# Altium PCB GRIPPER2009.PcbDoc (part 1 of 4)
Units mm, origin at the board's own origin, x right, y up, seen from the top; angles counter-clockwise.
Board outline 100.25 x 80.25 mm, 4 copper layers (Top Layer, Mid-Layer 1, Mid-Layer 2, Bottom Layer); 370 components, 241 nets, 1110 pads, 418 vias.
Unrouted connection lines stored in the file: 10.
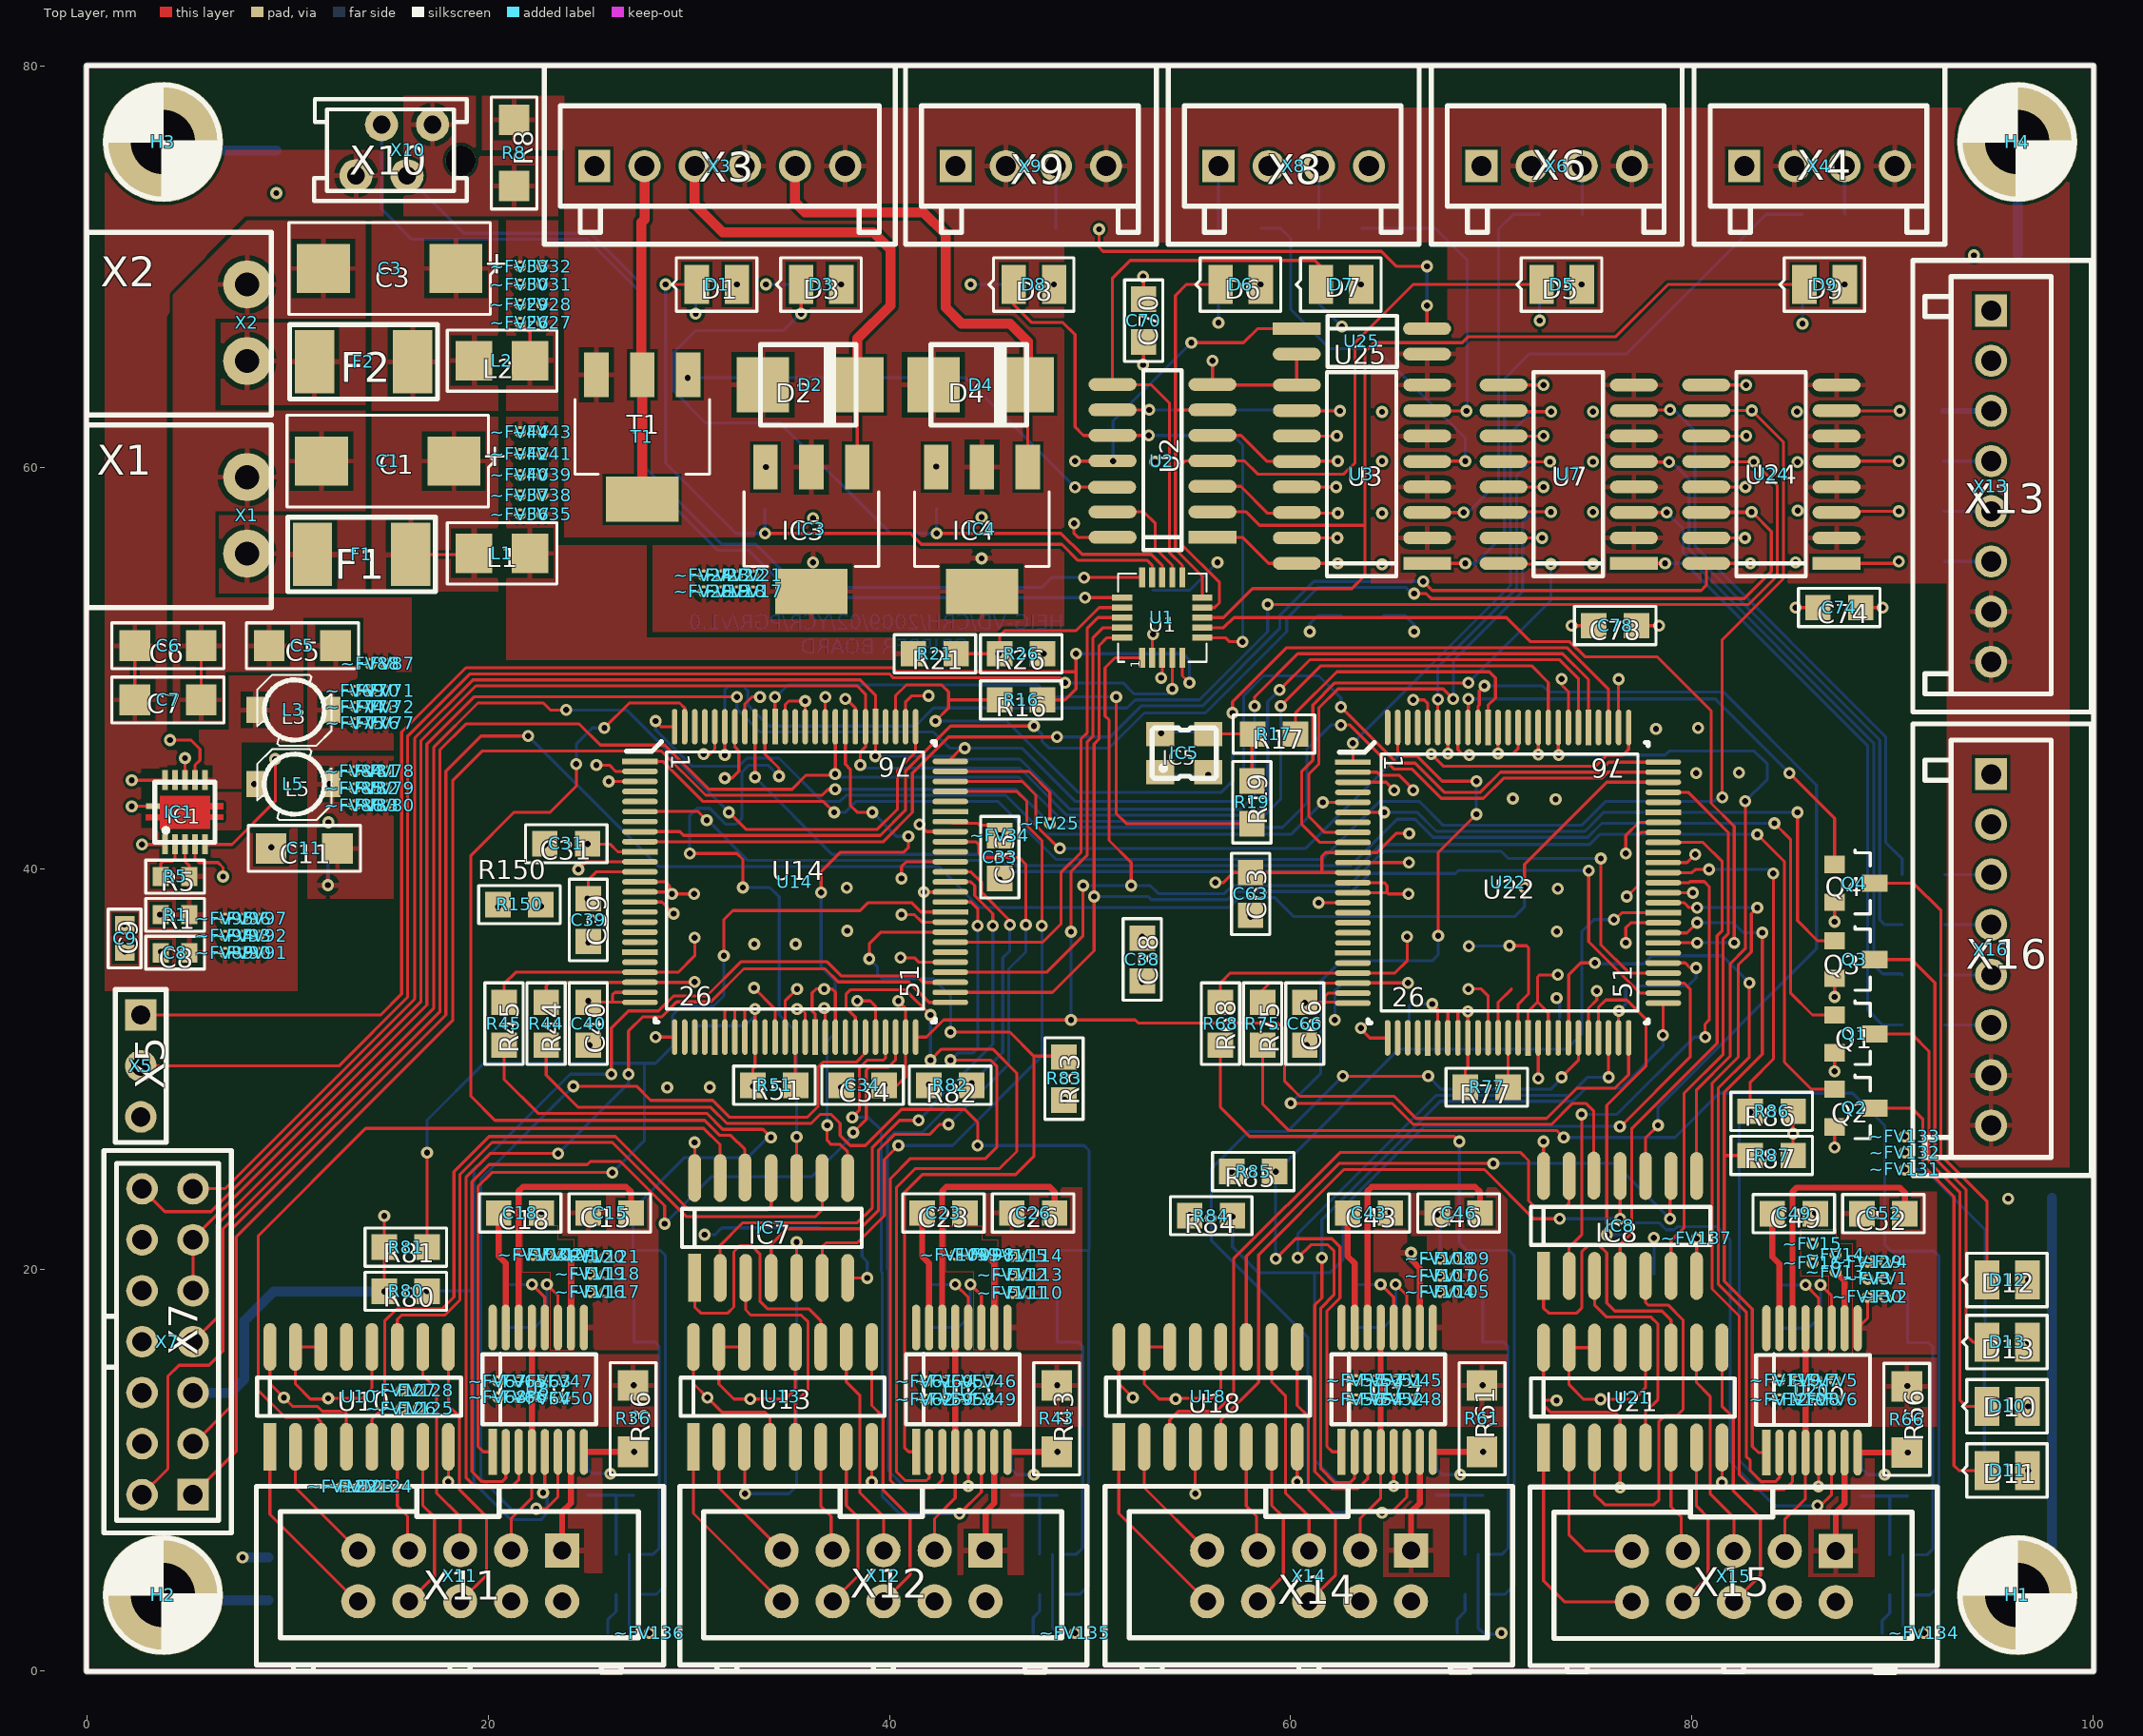
[diagram p0: Top Layer view]
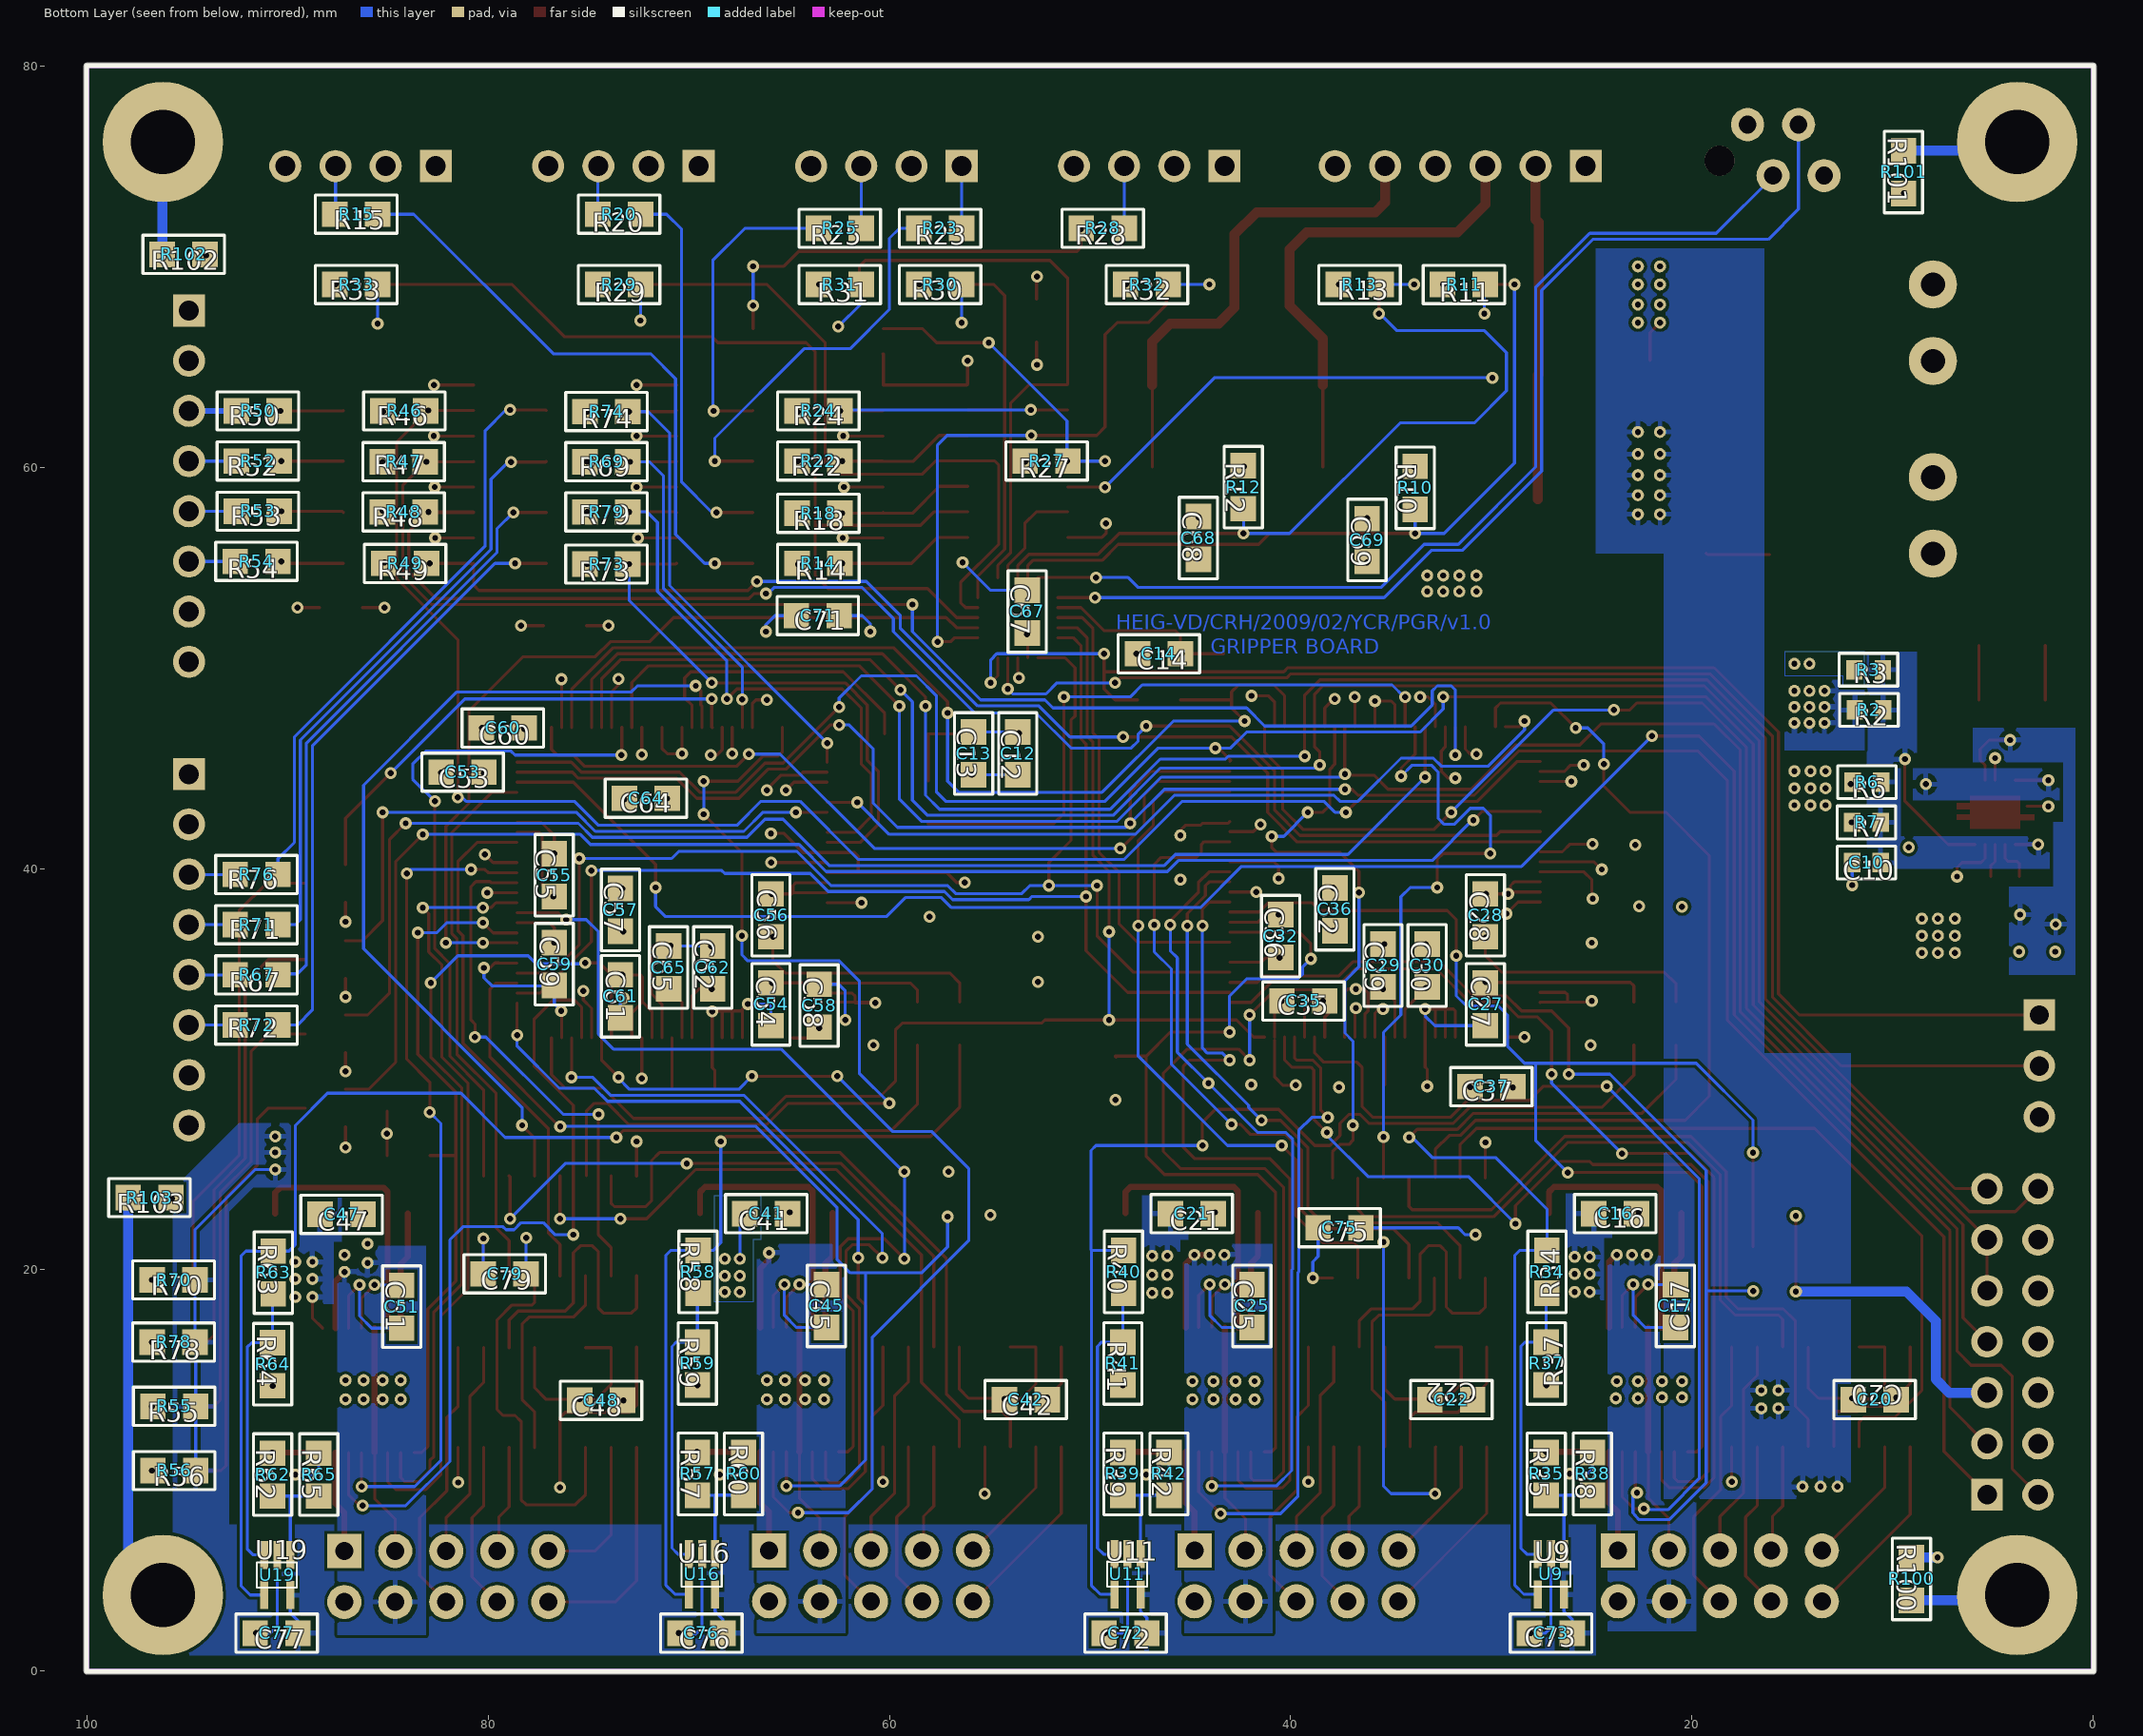
[diagram p1: Bottom Layer view, seen from below]
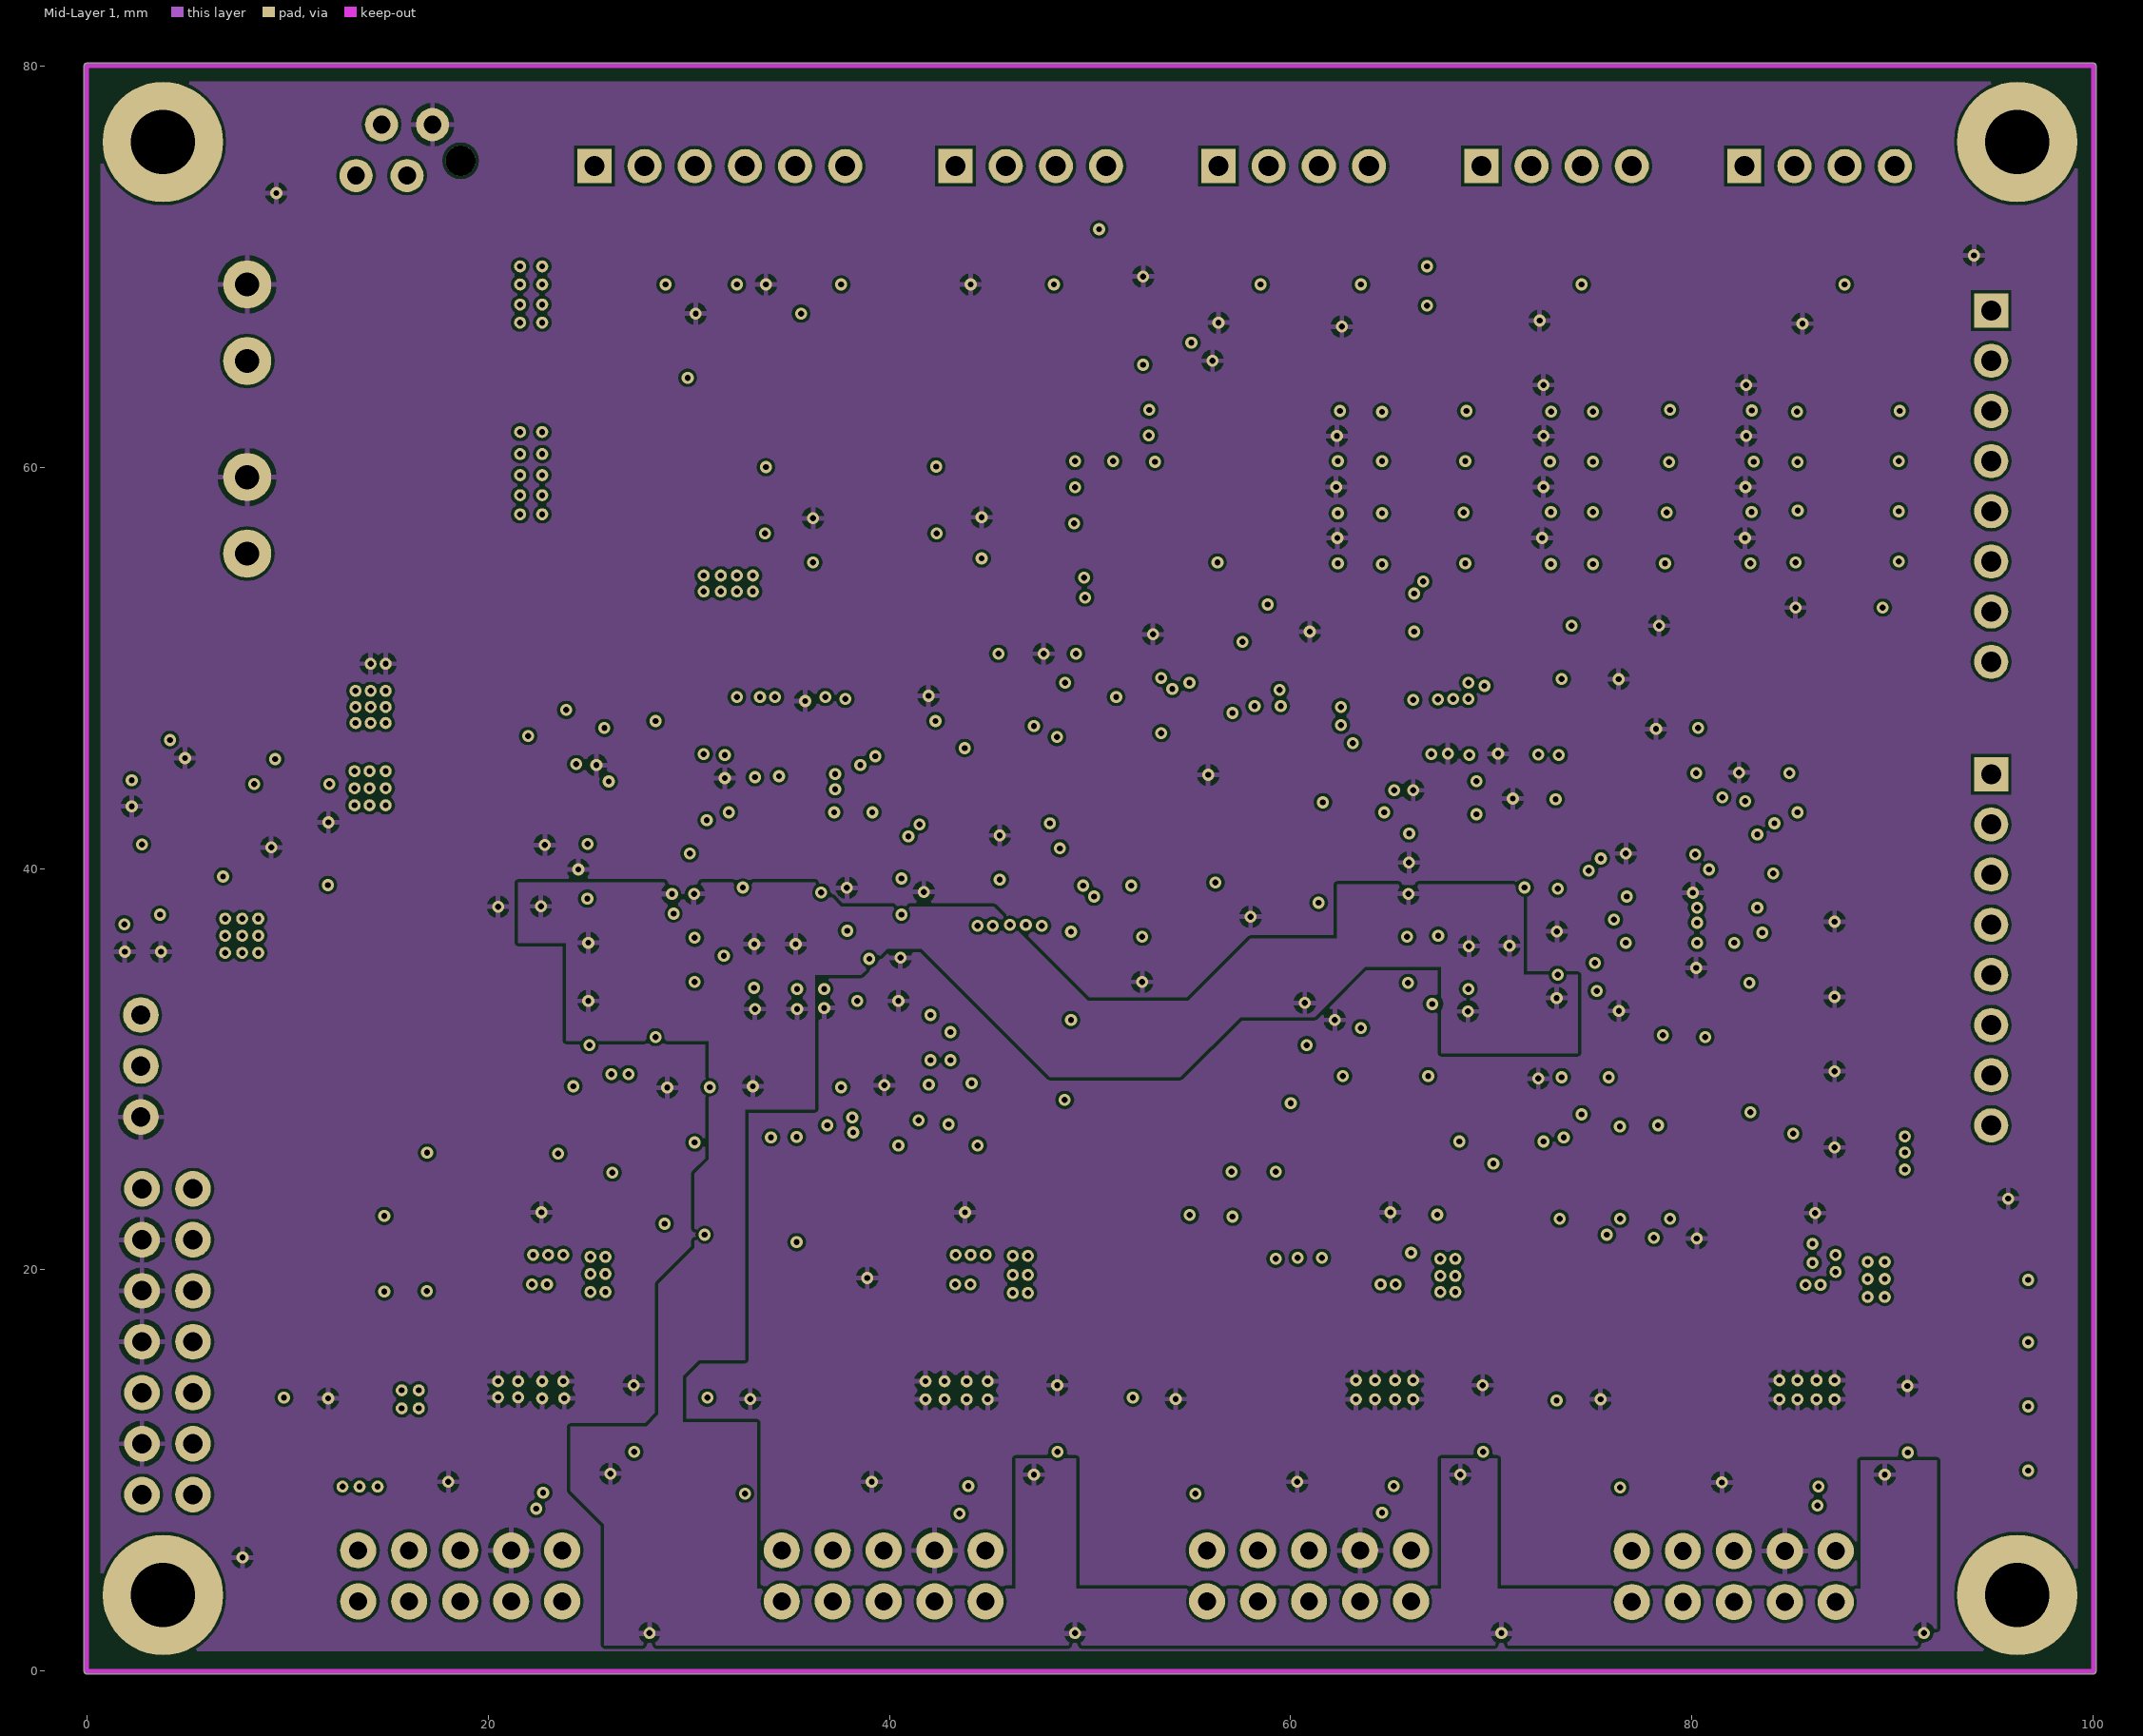
[diagram p2: Mid-Layer 1]
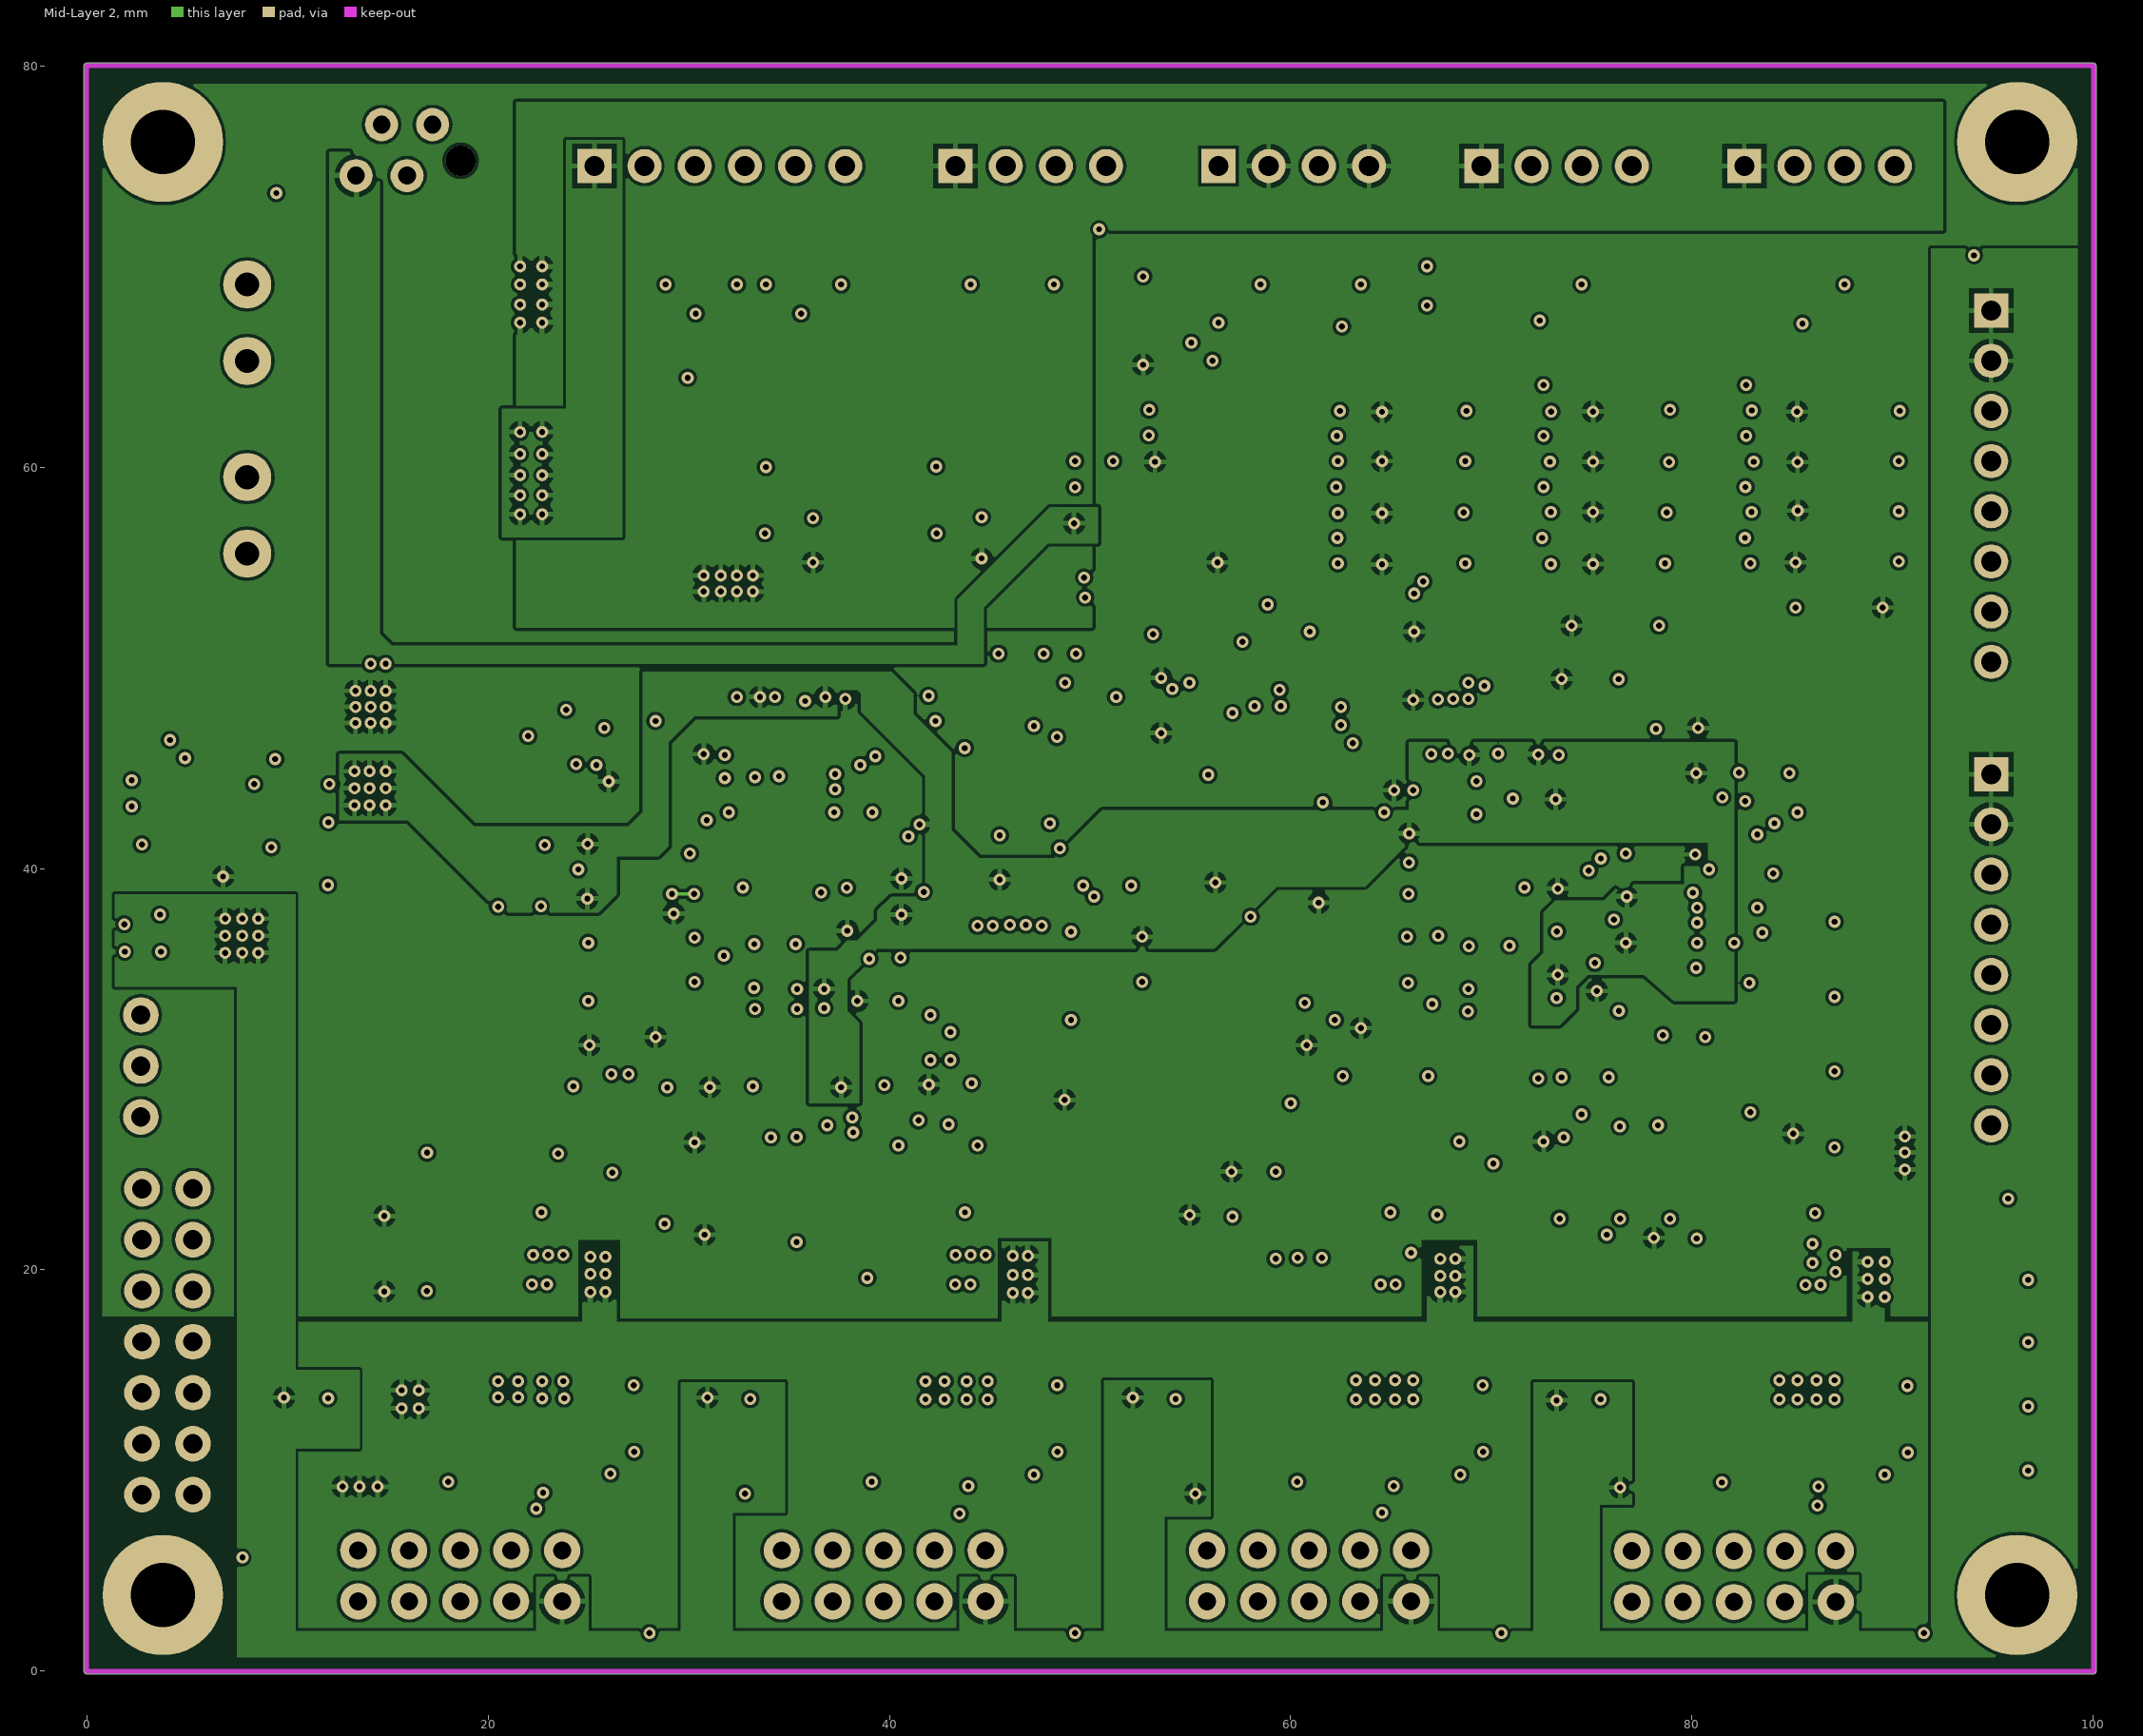
[diagram p3: Mid-Layer 2]

## Layer stack, top to bottom
Top Solder: solder mask 0.0102, Solder Resist, Dk 3.5
Top Layer: signal copper 0.0356
Dielectric 1: dielectric 0.32, FR-4, Dk 4.8
Mid-Layer 1: signal copper 0.0356
Dielectric2: dielectric 0.32, FR-4, Dk 4.8
Mid-Layer 2: signal copper 0.0356
Dielectric3: dielectric 0.32, FR-4, Dk 4.8
Bottom Layer: signal copper 0.0356
Bottom Solder: solder mask 0.0102, Solder Resist, Dk 3.5

## Board outline
-0.125,0 -0.125,80 cw(c0,80) 0,80.125 100,80.125 cw(c100,80) 100.125,80 100.125,0 cw(c100,0) 100,-0.125 0,-0.125 cw(c0,0)

## Design rules (kind name [scope] priority, off if disabled: settings)
Clearance Clearance_4 [OnLayer('Mid-Layer 2') And (IsThruPin Or IsSMTPin Or IsWire) vs OnLayer('Mid-Layer 2') And (IsThruPin Or IsSMTPin Or IsWire Or IsVia)] p1: gap=0.15 ignorepadtopadclearanceinfootprint=FALSE
Clearance Clearance_3 [OnLayer('Mid-Layer 1') And (IsThruPin Or IsSMTPin Or IsWire) vs OnLayer('Mid-Layer 1') And (IsThruPin Or IsSMTPin Or IsWire Or IsVia)] p2: gap=0.15 ignorepadtopadclearanceinfootprint=FALSE
Clearance Clearance_2 [OnLayer('Bottom Layer') And (IsThruPin Or IsSMTPin Or IsWire) vs OnLayer('Bottom Layer') And (IsThruPin Or IsSMTPin Or IsWire Or IsVia)] p3: gap=0.15 ignorepadtopadclearanceinfootprint=FALSE
Clearance Clearance_1 [OnLayer('Top Layer') And (IsThruPin Or IsSMTPin Or IsWire Or IsVia) vs OnLayer('Top Layer') And (IsThruPin Or IsSMTPin Or IsWire Or IsVia)] p4: gap=0.15 ignorepadtopadclearanceinfootprint=FALSE
Clearance [All] p5: gap=0.152 ignorepadtopadclearanceinfootprint=FALSE
PlaneConnect [All] p1: planeconnectstyle=Relief reliefexpansion=0.15 reliefentries=4 reliefconductorwidth=0.15 reliefairgap=0.3
PolygonConnect [All] p1: connectstyle=Relief reliefconductorwidth=0.254 reliefentries=4 polygonreliefangle="90 Angle" airgapwidth=0.254
RoutingLayers RoutingLayers_1 [All] p1: top layer_v5=TRUE mid layer 1_v5=TRUE mid layer 2_v5=TRUE bottom layer_v5=TRUE
RoutingLayers [All] p2: top layer_v5=TRUE mid layer 1_v5=TRUE mid layer 2_v5=TRUE bottom layer_v5=TRUE
RoutingVias [All] p1: holewidth=0.711 width=1.27 viastyle="Through Hole" minholewidth=0.711 minwidth=1.27 maxholewidth=0.711 maxwidth=1.27
SolderMaskExpansion [All] p1: expansion=0 istentingtop=FALSE
ViasUnderSMD VIA_UnderSMD_973 [(Name = 'X16-8')] p1: allowed=TRUE
ViasUnderSMD VIA_UnderSMD_972 [(Name = 'X16-7')] p2: allowed=FALSE
ViasUnderSMD VIA_UnderSMD_971 [(Name = 'X16-6')] p3: allowed=FALSE
ViasUnderSMD VIA_UnderSMD_970 [(Name = 'X16-5')] p4: allowed=FALSE
ViasUnderSMD VIA_UnderSMD_969 [(Name = 'X16-4')] p5: allowed=FALSE
ViasUnderSMD VIA_UnderSMD_968 [(Name = 'X16-3')] p6: allowed=FALSE
ViasUnderSMD VIA_UnderSMD_967 [(Name = 'X16-2')] p7: allowed=FALSE
ViasUnderSMD VIA_UnderSMD_966 [(Name = 'X16-1')] p8: allowed=FALSE
ViasUnderSMD VIA_UnderSMD_965 [(Name = 'X15-10')] p9: allowed=FALSE
ViasUnderSMD VIA_UnderSMD_964 [(Name = 'X15-9')] p10: allowed=FALSE
ViasUnderSMD VIA_UnderSMD_963 [(Name = 'X15-8')] p11: allowed=FALSE
ViasUnderSMD VIA_UnderSMD_962 [(Name = 'X15-7')] p12: allowed=FALSE
ViasUnderSMD VIA_UnderSMD_961 [(Name = 'X15-6')] p13: allowed=FALSE
ViasUnderSMD VIA_UnderSMD_960 [(Name = 'X15-5')] p14: allowed=FALSE
ViasUnderSMD VIA_UnderSMD_959 [(Name = 'X15-4')] p15: allowed=FALSE
ViasUnderSMD VIA_UnderSMD_958 [(Name = 'X15-3')] p16: allowed=FALSE
ViasUnderSMD VIA_UnderSMD_957 [(Name = 'X15-2')] p17: allowed=FALSE
ViasUnderSMD VIA_UnderSMD_956 [(Name = 'X15-1')] p18: allowed=FALSE
ViasUnderSMD VIA_UnderSMD_955 [(Name = 'X14-10')] p19: allowed=FALSE
ViasUnderSMD VIA_UnderSMD_954 [(Name = 'X14-9')] p20: allowed=FALSE
ViasUnderSMD VIA_UnderSMD_953 [(Name = 'X14-8')] p21: allowed=FALSE
ViasUnderSMD VIA_UnderSMD_952 [(Name = 'X14-7')] p22: allowed=FALSE
ViasUnderSMD VIA_UnderSMD_951 [(Name = 'X14-6')] p23: allowed=FALSE
ViasUnderSMD VIA_UnderSMD_950 [(Name = 'X14-5')] p24: allowed=FALSE
ViasUnderSMD VIA_UnderSMD_949 [(Name = 'X14-4')] p25: allowed=FALSE
ViasUnderSMD VIA_UnderSMD_948 [(Name = 'X14-3')] p26: allowed=FALSE
ViasUnderSMD VIA_UnderSMD_947 [(Name = 'X14-2')] p27: allowed=FALSE
ViasUnderSMD VIA_UnderSMD_946 [(Name = 'X14-1')] p28: allowed=FALSE
ViasUnderSMD VIA_UnderSMD_945 [(Name = 'X13-8')] p29: allowed=FALSE
ViasUnderSMD VIA_UnderSMD_944 [(Name = 'X13-7')] p30: allowed=FALSE
ViasUnderSMD VIA_UnderSMD_943 [(Name = 'X13-6')] p31: allowed=FALSE
ViasUnderSMD VIA_UnderSMD_942 [(Name = 'X13-5')] p32: allowed=FALSE
ViasUnderSMD VIA_UnderSMD_941 [(Name = 'X13-4')] p33: allowed=FALSE
ViasUnderSMD VIA_UnderSMD_940 [(Name = 'X13-3')] p34: allowed=FALSE
ViasUnderSMD VIA_UnderSMD_939 [(Name = 'X13-2')] p35: allowed=FALSE
ViasUnderSMD VIA_UnderSMD_938 [(Name = 'X13-1')] p36: allowed=FALSE
ViasUnderSMD VIA_UnderSMD_937 [(Name = 'X12-10')] p37: allowed=FALSE
ViasUnderSMD VIA_UnderSMD_936 [(Name = 'X12-9')] p38: allowed=FALSE
ViasUnderSMD VIA_UnderSMD_935 [(Name = 'X12-8')] p39: allowed=FALSE
ViasUnderSMD VIA_UnderSMD_934 [(Name = 'X12-7')] p40: allowed=FALSE
ViasUnderSMD VIA_UnderSMD_933 [(Name = 'X12-6')] p41: allowed=FALSE
ViasUnderSMD VIA_UnderSMD_932 [(Name = 'X12-5')] p42: allowed=FALSE
ViasUnderSMD VIA_UnderSMD_931 [(Name = 'X12-4')] p43: allowed=FALSE
ViasUnderSMD VIA_UnderSMD_930 [(Name = 'X12-3')] p44: allowed=FALSE
ViasUnderSMD VIA_UnderSMD_929 [(Name = 'X12-2')] p45: allowed=FALSE
ViasUnderSMD VIA_UnderSMD_928 [(Name = 'X12-1')] p46: allowed=FALSE
ViasUnderSMD VIA_UnderSMD_927 [(Name = 'X11-10')] p47: allowed=FALSE
ViasUnderSMD VIA_UnderSMD_926 [(Name = 'X11-9')] p48: allowed=FALSE
ViasUnderSMD VIA_UnderSMD_925 [(Name = 'X11-8')] p49: allowed=FALSE
ViasUnderSMD VIA_UnderSMD_924 [(Name = 'X11-7')] p50: allowed=FALSE
ViasUnderSMD VIA_UnderSMD_923 [(Name = 'X11-6')] p51: allowed=FALSE
ViasUnderSMD VIA_UnderSMD_922 [(Name = 'X11-5')] p52: allowed=FALSE
ViasUnderSMD VIA_UnderSMD_921 [(Name = 'X11-4')] p53: allowed=FALSE
ViasUnderSMD VIA_UnderSMD_920 [(Name = 'X11-3')] p54: allowed=FALSE
ViasUnderSMD VIA_UnderSMD_919 [(Name = 'X11-2')] p55: allowed=FALSE
ViasUnderSMD VIA_UnderSMD_918 [(Name = 'X11-1')] p56: allowed=FALSE
ViasUnderSMD VIA_UnderSMD_917 [(Name = 'X10-HOLE')] p57: allowed=FALSE
ViasUnderSMD VIA_UnderSMD_916 [(Name = 'X10-4')] p58: allowed=FALSE
ViasUnderSMD VIA_UnderSMD_915 [(Name = 'X10-3')] p59: allowed=FALSE
ViasUnderSMD VIA_UnderSMD_914 [(Name = 'X10-2')] p60: allowed=FALSE
ViasUnderSMD VIA_UnderSMD_913 [(Name = 'X10-1')] p61: allowed=FALSE
ViasUnderSMD VIA_UnderSMD_912 [(Name = 'X9-4')] p62: allowed=FALSE
ViasUnderSMD VIA_UnderSMD_911 [(Name = 'X9-3')] p63: allowed=FALSE
ViasUnderSMD VIA_UnderSMD_910 [(Name = 'X9-2')] p64: allowed=FALSE
ViasUnderSMD VIA_UnderSMD_909 [(Name = 'X9-1')] p65: allowed=FALSE
ViasUnderSMD VIA_UnderSMD_908 [(Name = 'X8-4')] p66: allowed=FALSE
ViasUnderSMD VIA_UnderSMD_907 [(Name = 'X8-3')] p67: allowed=FALSE
ViasUnderSMD VIA_UnderSMD_906 [(Name = 'X8-2')] p68: allowed=FALSE
ViasUnderSMD VIA_UnderSMD_905 [(Name = 'X8-1')] p69: allowed=FALSE
ViasUnderSMD VIA_UnderSMD_904 [(Name = 'X7-14')] p70: allowed=FALSE
ViasUnderSMD VIA_UnderSMD_903 [(Name = 'X7-13')] p71: allowed=FALSE
ViasUnderSMD VIA_UnderSMD_902 [(Name = 'X7-12')] p72: allowed=FALSE
ViasUnderSMD VIA_UnderSMD_901 [(Name = 'X7-11')] p73: allowed=FALSE
ViasUnderSMD VIA_UnderSMD_900 [(Name = 'X7-10')] p74: allowed=FALSE
ViasUnderSMD VIA_UnderSMD_899 [(Name = 'X7-9')] p75: allowed=FALSE
ViasUnderSMD VIA_UnderSMD_898 [(Name = 'X7-8')] p76: allowed=FALSE
ViasUnderSMD VIA_UnderSMD_897 [(Name = 'X7-7')] p77: allowed=FALSE
ViasUnderSMD VIA_UnderSMD_896 [(Name = 'X7-6')] p78: allowed=FALSE
ViasUnderSMD VIA_UnderSMD_895 [(Name = 'X7-5')] p79: allowed=FALSE
ViasUnderSMD VIA_UnderSMD_894 [(Name = 'X7-4')] p80: allowed=FALSE
ViasUnderSMD VIA_UnderSMD_893 [(Name = 'X7-3')] p81: allowed=FALSE
ViasUnderSMD VIA_UnderSMD_892 [(Name = 'X7-2')] p82: allowed=FALSE
ViasUnderSMD VIA_UnderSMD_891 [(Name = 'X7-1')] p83: allowed=FALSE
ViasUnderSMD VIA_UnderSMD_890 [(Name = 'X6-4')] p84: allowed=FALSE
ViasUnderSMD VIA_UnderSMD_889 [(Name = 'X6-3')] p85: allowed=FALSE
ViasUnderSMD VIA_UnderSMD_888 [(Name = 'X6-2')] p86: allowed=FALSE
ViasUnderSMD VIA_UnderSMD_887 [(Name = 'X6-1')] p87: allowed=FALSE
ViasUnderSMD VIA_UnderSMD_886 [(Name = 'X5-3')] p88: allowed=FALSE
ViasUnderSMD VIA_UnderSMD_885 [(Name = 'X5-2')] p89: allowed=FALSE
ViasUnderSMD VIA_UnderSMD_884 [(Name = 'X5-1')] p90: allowed=FALSE
ViasUnderSMD VIA_UnderSMD_883 [(Name = 'X4-4')] p91: allowed=FALSE
ViasUnderSMD VIA_UnderSMD_882 [(Name = 'X4-3')] p92: allowed=FALSE
ViasUnderSMD VIA_UnderSMD_881 [(Name = 'X4-2')] p93: allowed=FALSE
ViasUnderSMD VIA_UnderSMD_880 [(Name = 'X4-1')] p94: allowed=FALSE
ViasUnderSMD VIA_UnderSMD_879 [(Name = 'X3-6')] p95: allowed=FALSE
ViasUnderSMD VIA_UnderSMD_878 [(Name = 'X3-5')] p96: allowed=FALSE
ViasUnderSMD VIA_UnderSMD_877 [(Name = 'X3-4')] p97: allowed=FALSE
ViasUnderSMD VIA_UnderSMD_876 [(Name = 'X3-3')] p98: allowed=FALSE
ViasUnderSMD VIA_UnderSMD_875 [(Name = 'X3-2')] p99: allowed=FALSE
ViasUnderSMD VIA_UnderSMD_874 [(Name = 'X3-1')] p100: allowed=FALSE
ViasUnderSMD VIA_UnderSMD_873 [(Name = 'X2-2')] p101: allowed=FALSE
ViasUnderSMD VIA_UnderSMD_872 [(Name = 'X2-1')] p102: allowed=FALSE
ViasUnderSMD VIA_UnderSMD_871 [(Name = 'X1-2')] p103: allowed=FALSE
ViasUnderSMD VIA_UnderSMD_870 [(Name = 'X1-1')] p104: allowed=FALSE
ViasUnderSMD VIA_UnderSMD_869 [(Name = 'U25-4')] p105: allowed=FALSE
ViasUnderSMD VIA_UnderSMD_868 [(Name = 'U25-3')] p106: allowed=FALSE
ViasUnderSMD VIA_UnderSMD_867 [(Name = 'U25-2')] p107: allowed=FALSE
ViasUnderSMD VIA_UnderSMD_866 [(Name = 'U25-1')] p108: allowed=FALSE
ViasUnderSMD VIA_UnderSMD_865 [(Name = 'U24-16')] p109: allowed=FALSE
ViasUnderSMD VIA_UnderSMD_864 [(Name = 'U24-15')] p110: allowed=FALSE
ViasUnderSMD VIA_UnderSMD_863 [(Name = 'U24-14')] p111: allowed=FALSE
ViasUnderSMD VIA_UnderSMD_862 [(Name = 'U24-13')] p112: allowed=FALSE
ViasUnderSMD VIA_UnderSMD_861 [(Name = 'U24-12')] p113: allowed=FALSE
ViasUnderSMD VIA_UnderSMD_860 [(Name = 'U24-11')] p114: allowed=FALSE
ViasUnderSMD VIA_UnderSMD_859 [(Name = 'U24-10')] p115: allowed=FALSE
ViasUnderSMD VIA_UnderSMD_858 [(Name = 'U24-9')] p116: allowed=FALSE
ViasUnderSMD VIA_UnderSMD_857 [(Name = 'U24-8')] p117: allowed=FALSE
ViasUnderSMD VIA_UnderSMD_856 [(Name = 'U24-7')] p118: allowed=FALSE
ViasUnderSMD VIA_UnderSMD_855 [(Name = 'U24-6')] p119: allowed=FALSE
ViasUnderSMD VIA_UnderSMD_854 [(Name = 'U24-5')] p120: allowed=FALSE
ViasUnderSMD VIA_UnderSMD_853 [(Name = 'U24-4')] p121: allowed=FALSE
ViasUnderSMD VIA_UnderSMD_852 [(Name = 'U24-3')] p122: allowed=FALSE
ViasUnderSMD VIA_UnderSMD_851 [(Name = 'U24-2')] p123: allowed=FALSE
ViasUnderSMD VIA_UnderSMD_850 [(Name = 'U24-1')] p124: allowed=FALSE
ViasUnderSMD VIA_UnderSMD_849 [(Name = 'U22-100')] p125: allowed=FALSE
ViasUnderSMD VIA_UnderSMD_848 [(Name = 'U22-99')] p126: allowed=FALSE
ViasUnderSMD VIA_UnderSMD_847 [(Name = 'U22-98')] p127: allowed=FALSE
ViasUnderSMD VIA_UnderSMD_846 [(Name = 'U22-97')] p128: allowed=FALSE
ViasUnderSMD VIA_UnderSMD_845 [(Name = 'U22-96')] p129: allowed=FALSE
ViasUnderSMD VIA_UnderSMD_844 [(Name = 'U22-95')] p130: allowed=FALSE
ViasUnderSMD VIA_UnderSMD_843 [(Name = 'U22-94')] p131: allowed=FALSE
ViasUnderSMD VIA_UnderSMD_842 [(Name = 'U22-93')] p132: allowed=FALSE
ViasUnderSMD VIA_UnderSMD_841 [(Name = 'U22-92')] p133: allowed=FALSE
ViasUnderSMD VIA_UnderSMD_840 [(Name = 'U22-91')] p134: allowed=FALSE
ViasUnderSMD VIA_UnderSMD_839 [(Name = 'U22-90')] p135: allowed=FALSE
ViasUnderSMD VIA_UnderSMD_838 [(Name = 'U22-89')] p136: allowed=FALSE
ViasUnderSMD VIA_UnderSMD_837 [(Name = 'U22-88')] p137: allowed=FALSE
ViasUnderSMD VIA_UnderSMD_836 [(Name = 'U22-87')] p138: allowed=FALSE
ViasUnderSMD VIA_UnderSMD_835 [(Name = 'U22-86')] p139: allowed=FALSE
ViasUnderSMD VIA_UnderSMD_834 [(Name = 'U22-85')] p140: allowed=FALSE
ViasUnderSMD VIA_UnderSMD_833 [(Name = 'U22-84')] p141: allowed=FALSE
ViasUnderSMD VIA_UnderSMD_832 [(Name = 'U22-83')] p142: allowed=FALSE
ViasUnderSMD VIA_UnderSMD_831 [(Name = 'U22-82')] p143: allowed=FALSE
ViasUnderSMD VIA_UnderSMD_830 [(Name = 'U22-81')] p144: allowed=FALSE
ViasUnderSMD VIA_UnderSMD_829 [(Name = 'U22-80')] p145: allowed=FALSE
ViasUnderSMD VIA_UnderSMD_828 [(Name = 'U22-79')] p146: allowed=FALSE
ViasUnderSMD VIA_UnderSMD_827 [(Name = 'U22-78')] p147: allowed=FALSE
ViasUnderSMD VIA_UnderSMD_826 [(Name = 'U22-77')] p148: allowed=FALSE
ViasUnderSMD VIA_UnderSMD_825 [(Name = 'U22-76')] p149: allowed=FALSE
ViasUnderSMD VIA_UnderSMD_824 [(Name = 'U22-75')] p150: allowed=FALSE
ViasUnderSMD VIA_UnderSMD_823 [(Name = 'U22-74')] p151: allowed=FALSE
ViasUnderSMD VIA_UnderSMD_822 [(Name = 'U22-73')] p152: allowed=FALSE
ViasUnderSMD VIA_UnderSMD_821 [(Name = 'U22-72')] p153: allowed=FALSE
ViasUnderSMD VIA_UnderSMD_820 [(Name = 'U22-71')] p154: allowed=FALSE
ViasUnderSMD VIA_UnderSMD_819 [(Name = 'U22-70')] p155: allowed=FALSE
ViasUnderSMD VIA_UnderSMD_818 [(Name = 'U22-69')] p156: allowed=FALSE
ViasUnderSMD VIA_UnderSMD_817 [(Name = 'U22-68')] p157: allowed=FALSE
ViasUnderSMD VIA_UnderSMD_816 [(Name = 'U22-67')] p158: allowed=FALSE
ViasUnderSMD VIA_UnderSMD_815 [(Name = 'U22-66')] p159: allowed=FALSE
ViasUnderSMD VIA_UnderSMD_814 [(Name = 'U22-65')] p160: allowed=FALSE
ViasUnderSMD VIA_UnderSMD_813 [(Name = 'U22-64')] p161: allowed=FALSE
ViasUnderSMD VIA_UnderSMD_812 [(Name = 'U22-63')] p162: allowed=FALSE
ViasUnderSMD VIA_UnderSMD_811 [(Name = 'U22-62')] p163: allowed=FALSE
ViasUnderSMD VIA_UnderSMD_810 [(Name = 'U22-61')] p164: allowed=FALSE
ViasUnderSMD VIA_UnderSMD_809 [(Name = 'U22-60')] p165: allowed=FALSE
ViasUnderSMD VIA_UnderSMD_808 [(Name = 'U22-59')] p166: allowed=FALSE
ViasUnderSMD VIA_UnderSMD_807 [(Name = 'U22-58')] p167: allowed=FALSE
ViasUnderSMD VIA_UnderSMD_806 [(Name = 'U22-57')] p168: allowed=FALSE
ViasUnderSMD VIA_UnderSMD_805 [(Name = 'U22-56')] p169: allowed=FALSE
ViasUnderSMD VIA_UnderSMD_804 [(Name = 'U22-55')] p170: allowed=FALSE
ViasUnderSMD VIA_UnderSMD_803 [(Name = 'U22-54')] p171: allowed=FALSE
ViasUnderSMD VIA_UnderSMD_802 [(Name = 'U22-53')] p172: allowed=FALSE
ViasUnderSMD VIA_UnderSMD_801 [(Name = 'U22-52')] p173: allowed=FALSE
ViasUnderSMD VIA_UnderSMD_800 [(Name = 'U22-51')] p174: allowed=FALSE
ViasUnderSMD VIA_UnderSMD_799 [(Name = 'U22-50')] p175: allowed=FALSE
ViasUnderSMD VIA_UnderSMD_798 [(Name = 'U22-49')] p176: allowed=FALSE
ViasUnderSMD VIA_UnderSMD_797 [(Name = 'U22-48')] p177: allowed=FALSE
ViasUnderSMD VIA_UnderSMD_796 [(Name = 'U22-47')] p178: allowed=FALSE
ViasUnderSMD VIA_UnderSMD_795 [(Name = 'U22-46')] p179: allowed=FALSE
ViasUnderSMD VIA_UnderSMD_794 [(Name = 'U22-45')] p180: allowed=FALSE
ViasUnderSMD VIA_UnderSMD_793 [(Name = 'U22-44')] p181: allowed=FALSE
ViasUnderSMD VIA_UnderSMD_792 [(Name = 'U22-43')] p182: allowed=FALSE
ViasUnderSMD VIA_UnderSMD_791 [(Name = 'U22-42')] p183: allowed=FALSE
ViasUnderSMD VIA_UnderSMD_790 [(Name = 'U22-41')] p184: allowed=FALSE
ViasUnderSMD VIA_UnderSMD_789 [(Name = 'U22-40')] p185: allowed=FALSE
ViasUnderSMD VIA_UnderSMD_788 [(Name = 'U22-39')] p186: allowed=FALSE
ViasUnderSMD VIA_UnderSMD_787 [(Name = 'U22-38')] p187: allowed=FALSE
ViasUnderSMD VIA_UnderSMD_786 [(Name = 'U22-37')] p188: allowed=FALSE
ViasUnderSMD VIA_UnderSMD_785 [(Name = 'U22-36')] p189: allowed=FALSE
ViasUnderSMD VIA_UnderSMD_784 [(Name = 'U22-35')] p190: allowed=FALSE
ViasUnderSMD VIA_UnderSMD_783 [(Name = 'U22-34')] p191: allowed=FALSE
ViasUnderSMD VIA_UnderSMD_782 [(Name = 'U22-33')] p192: allowed=FALSE
ViasUnderSMD VIA_UnderSMD_781 [(Name = 'U22-32')] p193: allowed=FALSE
ViasUnderSMD VIA_UnderSMD_780 [(Name = 'U22-31')] p194: allowed=FALSE
ViasUnderSMD VIA_UnderSMD_779 [(Name = 'U22-30')] p195: allowed=FALSE
ViasUnderSMD VIA_UnderSMD_778 [(Name = 'U22-29')] p196: allowed=FALSE
ViasUnderSMD VIA_UnderSMD_777 [(Name = 'U22-28')] p197: allowed=FALSE
ViasUnderSMD VIA_UnderSMD_776 [(Name = 'U22-27')] p198: allowed=FALSE
ViasUnderSMD VIA_UnderSMD_775 [(Name = 'U22-26')] p199: allowed=FALSE
ViasUnderSMD VIA_UnderSMD_774 [(Name = 'U22-25')] p200: allowed=FALSE
ViasUnderSMD VIA_UnderSMD_773 [(Name = 'U22-24')] p201: allowed=FALSE
ViasUnderSMD VIA_UnderSMD_772 [(Name = 'U22-23')] p202: allowed=FALSE
ViasUnderSMD VIA_UnderSMD_771 [(Name = 'U22-22')] p203: allowed=FALSE
ViasUnderSMD VIA_UnderSMD_770 [(Name = 'U22-21')] p204: allowed=FALSE
ViasUnderSMD VIA_UnderSMD_769 [(Name = 'U22-20')] p205: allowed=FALSE
ViasUnderSMD VIA_UnderSMD_768 [(Name = 'U22-19')] p206: allowed=FALSE
ViasUnderSMD VIA_UnderSMD_767 [(Name = 'U22-18')] p207: allowed=FALSE
ViasUnderSMD VIA_UnderSMD_766 [(Name = 'U22-17')] p208: allowed=FALSE
ViasUnderSMD VIA_UnderSMD_765 [(Name = 'U22-16')] p209: allowed=FALSE
ViasUnderSMD VIA_UnderSMD_764 [(Name = 'U22-15')] p210: allowed=FALSE
ViasUnderSMD VIA_UnderSMD_763 [(Name = 'U22-14')] p211: allowed=FALSE
ViasUnderSMD VIA_UnderSMD_762 [(Name = 'U22-13')] p212: allowed=FALSE
ViasUnderSMD VIA_UnderSMD_761 [(Name = 'U22-12')] p213: allowed=FALSE
ViasUnderSMD VIA_UnderSMD_760 [(Name = 'U22-11')] p214: allowed=FALSE
ViasUnderSMD VIA_UnderSMD_759 [(Name = 'U22-10')] p215: allowed=FALSE
ViasUnderSMD VIA_UnderSMD_758 [(Name = 'U22-9')] p216: allowed=FALSE
ViasUnderSMD VIA_UnderSMD_757 [(Name = 'U22-8')] p217: allowed=FALSE
ViasUnderSMD VIA_UnderSMD_756 [(Name = 'U22-7')] p218: allowed=FALSE
ViasUnderSMD VIA_UnderSMD_755 [(Name = 'U22-6')] p219: allowed=FALSE
ViasUnderSMD VIA_UnderSMD_754 [(Name = 'U22-5')] p220: allowed=FALSE
ViasUnderSMD VIA_UnderSMD_753 [(Name = 'U22-4')] p221: allowed=FALSE
ViasUnderSMD VIA_UnderSMD_752 [(Name = 'U22-3')] p222: allowed=FALSE
ViasUnderSMD VIA_UnderSMD_751 [(Name = 'U22-2')] p223: allowed=FALSE
ViasUnderSMD VIA_UnderSMD_750 [(Name = 'U22-1')] p224: allowed=FALSE
ViasUnderSMD VIA_UnderSMD_749 [(Name = 'U21-16')] p225: allowed=FALSE
ViasUnderSMD VIA_UnderSMD_748 [(Name = 'U21-15')] p226: allowed=FALSE
ViasUnderSMD VIA_UnderSMD_747 [(Name = 'U21-14')] p227: allowed=FALSE
ViasUnderSMD VIA_UnderSMD_746 [(Name = 'U21-13')] p228: allowed=FALSE
ViasUnderSMD VIA_UnderSMD_745 [(Name = 'U21-12')] p229: allowed=FALSE
ViasUnderSMD VIA_UnderSMD_744 [(Name = 'U21-11')] p230: allowed=FALSE
ViasUnderSMD VIA_UnderSMD_743 [(Name = 'U21-10')] p231: allowed=FALSE
ViasUnderSMD VIA_UnderSMD_742 [(Name = 'U21-9')] p232: allowed=FALSE
ViasUnderSMD VIA_UnderSMD_741 [(Name = 'U21-8')] p233: allowed=FALSE
ViasUnderSMD VIA_UnderSMD_740 [(Name = 'U21-7')] p234: allowed=FALSE
ViasUnderSMD VIA_UnderSMD_739 [(Name = 'U21-6')] p235: allowed=FALSE
ViasUnderSMD VIA_UnderSMD_738 [(Name = 'U21-5')] p236: allowed=FALSE
ViasUnderSMD VIA_UnderSMD_737 [(Name = 'U21-4')] p237: allowed=FALSE
ViasUnderSMD VIA_UnderSMD_736 [(Name = 'U21-3')] p238: allowed=FALSE
ViasUnderSMD VIA_UnderSMD_735 [(Name = 'U21-2')] p239: allowed=FALSE
ViasUnderSMD VIA_UnderSMD_734 [(Name = 'U21-1')] p240: allowed=FALSE
ViasUnderSMD VIA_UnderSMD_733 [(Name = 'U20-16')] p241: allowed=FALSE
ViasUnderSMD VIA_UnderSMD_732 [(Name = 'U20-15')] p242: allowed=FALSE
ViasUnderSMD VIA_UnderSMD_731 [(Name = 'U20-10')] p243: allowed=FALSE
ViasUnderSMD VIA_UnderSMD_730 [(Name = 'U20-9')] p244: allowed=FALSE
ViasUnderSMD VIA_UnderSMD_729 [(Name = 'U20-8')] p245: allowed=FALSE
ViasUnderSMD VIA_UnderSMD_728 [(Name = 'U20-7')] p246: allowed=FALSE
ViasUnderSMD VIA_UnderSMD_727 [(Name = 'U20-6')] p247: allowed=FALSE
ViasUnderSMD VIA_UnderSMD_726 [(Name = 'U20-5')] p248: allowed=FALSE
ViasUnderSMD VIA_UnderSMD_725 [(Name = 'U20-14')] p249: allowed=FALSE
ViasUnderSMD VIA_UnderSMD_724 [(Name = 'U20-13')] p250: allowed=FALSE
ViasUnderSMD VIA_UnderSMD_723 [(Name = 'U20-12')] p251: allowed=FALSE
ViasUnderSMD VIA_UnderSMD_722 [(Name = 'U20-11')] p252: allowed=FALSE
ViasUnderSMD VIA_UnderSMD_721 [(Name = 'U20-4')] p253: allowed=FALSE
ViasUnderSMD VIA_UnderSMD_720 [(Name = 'U20-3')] p254: allowed=FALSE
ViasUnderSMD VIA_UnderSMD_719 [(Name = 'U20-2')] p255: allowed=FALSE
ViasUnderSMD VIA_UnderSMD_718 [(Name = 'U20-1')] p256: allowed=FALSE
ViasUnderSMD VIA_UnderSMD_717 [(Name = 'U19-5')] p257: allowed=FALSE
ViasUnderSMD VIA_UnderSMD_716 [(Name = 'U19-4')] p258: allowed=FALSE
ViasUnderSMD VIA_UnderSMD_715 [(Name = 'U19-3')] p259: allowed=FALSE
ViasUnderSMD VIA_UnderSMD_714 [(Name = 'U19-2')] p260: allowed=FALSE
ViasUnderSMD VIA_UnderSMD_713 [(Name = 'U19-1')] p261: allowed=FALSE
ViasUnderSMD VIA_UnderSMD_712 [(Name = 'U18-16')] p262: allowed=FALSE
ViasUnderSMD VIA_UnderSMD_711 [(Name = 'U18-15')] p263: allowed=FALSE
ViasUnderSMD VIA_UnderSMD_710 [(Name = 'U18-14')] p264: allowed=FALSE
ViasUnderSMD VIA_UnderSMD_709 [(Name = 'U18-13')] p265: allowed=FALSE
ViasUnderSMD VIA_UnderSMD_708 [(Name = 'U18-12')] p266: allowed=FALSE
ViasUnderSMD VIA_UnderSMD_707 [(Name = 'U18-11')] p267: allowed=FALSE
ViasUnderSMD VIA_UnderSMD_706 [(Name = 'U18-10')] p268: allowed=FALSE
ViasUnderSMD VIA_UnderSMD_705 [(Name = 'U18-9')] p269: allowed=FALSE
ViasUnderSMD VIA_UnderSMD_704 [(Name = 'U18-8')] p270: allowed=FALSE
ViasUnderSMD VIA_UnderSMD_703 [(Name = 'U18-7')] p271: allowed=FALSE
ViasUnderSMD VIA_UnderSMD_702 [(Name = 'U18-6')] p272: allowed=FALSE
ViasUnderSMD VIA_UnderSMD_701 [(Name = 'U18-5')] p273: allowed=FALSE
ViasUnderSMD VIA_UnderSMD_700 [(Name = 'U18-4')] p274: allowed=FALSE
ViasUnderSMD VIA_UnderSMD_699 [(Name = 'U18-3')] p275: allowed=FALSE
ViasUnderSMD VIA_UnderSMD_698 [(Name = 'U18-2')] p276: allowed=FALSE
ViasUnderSMD VIA_UnderSMD_697 [(Name = 'U18-1')] p277: allowed=FALSE
ViasUnderSMD VIA_UnderSMD_696 [(Name = 'U17-16')] p278: allowed=FALSE
ViasUnderSMD VIA_UnderSMD_695 [(Name = 'U17-15')] p279: allowed=FALSE
ViasUnderSMD VIA_UnderSMD_694 [(Name = 'U17-10')] p280: allowed=FALSE
ViasUnderSMD VIA_UnderSMD_693 [(Name = 'U17-9')] p281: allowed=FALSE
ViasUnderSMD VIA_UnderSMD_692 [(Name = 'U17-8')] p282: allowed=FALSE
ViasUnderSMD VIA_UnderSMD_691 [(Name = 'U17-7')] p283: allowed=FALSE
ViasUnderSMD VIA_UnderSMD_690 [(Name = 'U17-6')] p284: allowed=FALSE
ViasUnderSMD VIA_UnderSMD_689 [(Name = 'U17-5')] p285: allowed=FALSE
ViasUnderSMD VIA_UnderSMD_688 [(Name = 'U17-14')] p286: allowed=FALSE
ViasUnderSMD VIA_UnderSMD_687 [(Name = 'U17-13')] p287: allowed=FALSE
ViasUnderSMD VIA_UnderSMD_686 [(Name = 'U17-12')] p288: allowed=FALSE
ViasUnderSMD VIA_UnderSMD_685 [(Name = 'U17-11')] p289: allowed=FALSE
ViasUnderSMD VIA_UnderSMD_684 [(Name = 'U17-4')] p290: allowed=FALSE
ViasUnderSMD VIA_UnderSMD_683 [(Name = 'U17-3')] p291: allowed=FALSE
ViasUnderSMD VIA_UnderSMD_682 [(Name = 'U17-2')] p292: allowed=FALSE
ViasUnderSMD VIA_UnderSMD_681 [(Name = 'U17-1')] p293: allowed=FALSE
ViasUnderSMD VIA_UnderSMD_680 [(Name = 'U16-5')] p294: allowed=FALSE
ViasUnderSMD VIA_UnderSMD_679 [(Name = 'U16-4')] p295: allowed=FALSE
ViasUnderSMD VIA_UnderSMD_678 [(Name = 'U16-3')] p296: allowed=FALSE
ViasUnderSMD VIA_UnderSMD_677 [(Name = 'U16-2')] p297: allowed=FALSE
ViasUnderSMD VIA_UnderSMD_676 [(Name = 'U16-1')] p298: allowed=FALSE
ViasUnderSMD VIA_UnderSMD_675 [(Name = 'U14-100')] p299: allowed=FALSE
ViasUnderSMD VIA_UnderSMD_674 [(Name = 'U14-99')] p300: allowed=FALSE
ViasUnderSMD VIA_UnderSMD_673 [(Name = 'U14-98')] p301: allowed=FALSE
ViasUnderSMD VIA_UnderSMD_672 [(Name = 'U14-97')] p302: allowed=FALSE
ViasUnderSMD VIA_UnderSMD_671 [(Name = 'U14-96')] p303: allowed=FALSE
ViasUnderSMD VIA_UnderSMD_670 [(Name = 'U14-95')] p304: allowed=FALSE
ViasUnderSMD VIA_UnderSMD_669 [(Name = 'U14-94')] p305: allowed=FALSE
ViasUnderSMD VIA_UnderSMD_668 [(Name = 'U14-93')] p306: allowed=FALSE
ViasUnderSMD VIA_UnderSMD_667 [(Name = 'U14-92')] p307: allowed=FALSE
ViasUnderSMD VIA_UnderSMD_666 [(Name = 'U14-91')] p308: allowed=FALSE
ViasUnderSMD VIA_UnderSMD_665 [(Name = 'U14-90')] p309: allowed=FALSE
ViasUnderSMD VIA_UnderSMD_664 [(Name = 'U14-89')] p310: allowed=FALSE
ViasUnderSMD VIA_UnderSMD_663 [(Name = 'U14-88')] p311: allowed=FALSE
ViasUnderSMD VIA_UnderSMD_662 [(Name = 'U14-87')] p312: allowed=FALSE
ViasUnderSMD VIA_UnderSMD_661 [(Name = 'U14-86')] p313: allowed=FALSE
ViasUnderSMD VIA_UnderSMD_660 [(Name = 'U14-85')] p314: allowed=FALSE
ViasUnderSMD VIA_UnderSMD_659 [(Name = 'U14-84')] p315: allowed=FALSE
ViasUnderSMD VIA_UnderSMD_658 [(Name = 'U14-83')] p316: allowed=FALSE
ViasUnderSMD VIA_UnderSMD_657 [(Name = 'U14-82')] p317: allowed=FALSE
ViasUnderSMD VIA_UnderSMD_656 [(Name = 'U14-81')] p318: allowed=FALSE
ViasUnderSMD VIA_UnderSMD_655 [(Name = 'U14-80')] p319: allowed=FALSE
ViasUnderSMD VIA_UnderSMD_654 [(Name = 'U14-79')] p320: allowed=FALSE
ViasUnderSMD VIA_UnderSMD_653 [(Name = 'U14-78')] p321: allowed=FALSE
ViasUnderSMD VIA_UnderSMD_652 [(Name = 'U14-77')] p322: allowed=FALSE
ViasUnderSMD VIA_UnderSMD_651 [(Name = 'U14-76')] p323: allowed=FALSE
ViasUnderSMD VIA_UnderSMD_650 [(Name = 'U14-75')] p324: allowed=FALSE
ViasUnderSMD VIA_UnderSMD_649 [(Name = 'U14-74')] p325: allowed=FALSE
ViasUnderSMD VIA_UnderSMD_648 [(Name = 'U14-73')] p326: allowed=FALSE
ViasUnderSMD VIA_UnderSMD_647 [(Name = 'U14-72')] p327: allowed=FALSE
ViasUnderSMD VIA_UnderSMD_646 [(Name = 'U14-71')] p328: allowed=FALSE
ViasUnderSMD VIA_UnderSMD_645 [(Name = 'U14-70')] p329: allowed=FALSE
ViasUnderSMD VIA_UnderSMD_644 [(Name = 'U14-69')] p330: allowed=FALSE
ViasUnderSMD VIA_UnderSMD_643 [(Name = 'U14-68')] p331: allowed=FALSE
ViasUnderSMD VIA_UnderSMD_642 [(Name = 'U14-67')] p332: allowed=FALSE
ViasUnderSMD VIA_UnderSMD_641 [(Name = 'U14-66')] p333: allowed=FALSE
ViasUnderSMD VIA_UnderSMD_640 [(Name = 'U14-65')] p334: allowed=FALSE
ViasUnderSMD VIA_UnderSMD_639 [(Name = 'U14-64')] p335: allowed=FALSE
ViasUnderSMD VIA_UnderSMD_638 [(Name = 'U14-63')] p336: allowed=FALSE
ViasUnderSMD VIA_UnderSMD_637 [(Name = 'U14-62')] p337: allowed=FALSE
ViasUnderSMD VIA_UnderSMD_636 [(Name = 'U14-61')] p338: allowed=FALSE
ViasUnderSMD VIA_UnderSMD_635 [(Name = 'U14-60')] p339: allowed=FALSE
ViasUnderSMD VIA_UnderSMD_634 [(Name = 'U14-59')] p340: allowed=FALSE
ViasUnderSMD VIA_UnderSMD_633 [(Name = 'U14-58')] p341: allowed=FALSE
ViasUnderSMD VIA_UnderSMD_632 [(Name = 'U14-57')] p342: allowed=FALSE
ViasUnderSMD VIA_UnderSMD_631 [(Name = 'U14-56')] p343: allowed=FALSE
ViasUnderSMD VIA_UnderSMD_630 [(Name = 'U14-55')] p344: allowed=FALSE
ViasUnderSMD VIA_UnderSMD_629 [(Name = 'U14-54')] p345: allowed=FALSE
ViasUnderSMD VIA_UnderSMD_628 [(Name = 'U14-53')] p346: allowed=FALSE
ViasUnderSMD VIA_UnderSMD_627 [(Name = 'U14-52')] p347: allowed=FALSE
ViasUnderSMD VIA_UnderSMD_626 [(Name = 'U14-51')] p348: allowed=FALSE
ViasUnderSMD VIA_UnderSMD_625 [(Name = 'U14-50')] p349: allowed=FALSE
ViasUnderSMD VIA_UnderSMD_624 [(Name = 'U14-49')] p350: allowed=FALSE
ViasUnderSMD VIA_UnderSMD_623 [(Name = 'U14-48')] p351: allowed=FALSE
ViasUnderSMD VIA_UnderSMD_622 [(Name = 'U14-47')] p352: allowed=FALSE
ViasUnderSMD VIA_UnderSMD_621 [(Name = 'U14-46')] p353: allowed=FALSE
ViasUnderSMD VIA_UnderSMD_620 [(Name = 'U14-45')] p354: allowed=FALSE
ViasUnderSMD VIA_UnderSMD_619 [(Name = 'U14-44')] p355: allowed=FALSE
ViasUnderSMD VIA_UnderSMD_618 [(Name = 'U14-43')] p356: allowed=FALSE
ViasUnderSMD VIA_UnderSMD_617 [(Name = 'U14-42')] p357: allowed=FALSE
ViasUnderSMD VIA_UnderSMD_616 [(Name = 'U14-41')] p358: allowed=FALSE
ViasUnderSMD VIA_UnderSMD_615 [(Name = 'U14-40')] p359: allowed=FALSE
ViasUnderSMD VIA_UnderSMD_614 [(Name = 'U14-39')] p360: allowed=FALSE
ViasUnderSMD VIA_UnderSMD_613 [(Name = 'U14-38')] p361: allowed=FALSE
ViasUnderSMD VIA_UnderSMD_612 [(Name = 'U14-37')] p362: allowed=FALSE
ViasUnderSMD VIA_UnderSMD_611 [(Name = 'U14-36')] p363: allowed=FALSE
ViasUnderSMD VIA_UnderSMD_610 [(Name = 'U14-35')] p364: allowed=FALSE
ViasUnderSMD VIA_UnderSMD_609 [(Name = 'U14-34')] p365: allowed=FALSE
ViasUnderSMD VIA_UnderSMD_608 [(Name = 'U14-33')] p366: allowed=FALSE
ViasUnderSMD VIA_UnderSMD_607 [(Name = 'U14-32')] p367: allowed=FALSE
ViasUnderSMD VIA_UnderSMD_606 [(Name = 'U14-31')] p368: allowed=FALSE
ViasUnderSMD VIA_UnderSMD_605 [(Name = 'U14-30')] p369: allowed=FALSE
ViasUnderSMD VIA_UnderSMD_604 [(Name = 'U14-29')] p370: allowed=FALSE
ViasUnderSMD VIA_UnderSMD_603 [(Name = 'U14-28')] p371: allowed=FALSE
ViasUnderSMD VIA_UnderSMD_602 [(Name = 'U14-27')] p372: allowed=FALSE
ViasUnderSMD VIA_UnderSMD_601 [(Name = 'U14-26')] p373: allowed=FALSE
ViasUnderSMD VIA_UnderSMD_600 [(Name = 'U14-25')] p374: allowed=FALSE
ViasUnderSMD VIA_UnderSMD_599 [(Name = 'U14-24')] p375: allowed=FALSE
ViasUnderSMD VIA_UnderSMD_598 [(Name = 'U14-23')] p376: allowed=FALSE
ViasUnderSMD VIA_UnderSMD_597 [(Name = 'U14-22')] p377: allowed=FALSE
ViasUnderSMD VIA_UnderSMD_596 [(Name = 'U14-21')] p378: allowed=FALSE
ViasUnderSMD VIA_UnderSMD_595 [(Name = 'U14-20')] p379: allowed=FALSE
ViasUnderSMD VIA_UnderSMD_594 [(Name = 'U14-19')] p380: allowed=FALSE
ViasUnderSMD VIA_UnderSMD_593 [(Name = 'U14-18')] p381: allowed=FALSE
ViasUnderSMD VIA_UnderSMD_592 [(Name = 'U14-17')] p382: allowed=FALSE
ViasUnderSMD VIA_UnderSMD_591 [(Name = 'U14-16')] p383: allowed=FALSE
ViasUnderSMD VIA_UnderSMD_590 [(Name = 'U14-15')] p384: allowed=FALSE
ViasUnderSMD VIA_UnderSMD_589 [(Name = 'U14-14')] p385: allowed=FALSE
ViasUnderSMD VIA_UnderSMD_588 [(Name = 'U14-13')] p386: allowed=FALSE
ViasUnderSMD VIA_UnderSMD_587 [(Name = 'U14-12')] p387: allowed=FALSE
ViasUnderSMD VIA_UnderSMD_586 [(Name = 'U14-11')] p388: allowed=FALSE
ViasUnderSMD VIA_UnderSMD_585 [(Name = 'U14-10')] p389: allowed=FALSE
ViasUnderSMD VIA_UnderSMD_584 [(Name = 'U14-9')] p390: allowed=FALSE
ViasUnderSMD VIA_UnderSMD_583 [(Name = 'U14-8')] p391: allowed=FALSE
ViasUnderSMD VIA_UnderSMD_582 [(Name = 'U14-7')] p392: allowed=FALSE
ViasUnderSMD VIA_UnderSMD_581 [(Name = 'U14-6')] p393: allowed=FALSE
ViasUnderSMD VIA_UnderSMD_580 [(Name = 'U14-5')] p394: allowed=FALSE
ViasUnderSMD VIA_UnderSMD_579 [(Name = 'U14-4')] p395: allowed=FALSE
ViasUnderSMD VIA_UnderSMD_578 [(Name = 'U14-3')] p396: allowed=FALSE
ViasUnderSMD VIA_UnderSMD_577 [(Name = 'U14-2')] p397: allowed=FALSE
ViasUnderSMD VIA_UnderSMD_576 [(Name = 'U14-1')] p398: allowed=FALSE
ViasUnderSMD VIA_UnderSMD_575 [(Name = 'U13-16')] p399: allowed=FALSE
ViasUnderSMD VIA_UnderSMD_574 [(Name = 'U13-15')] p400: allowed=FALSE
ViasUnderSMD VIA_UnderSMD_573 [(Name = 'U13-14')] p401: allowed=FALSE
ViasUnderSMD VIA_UnderSMD_572 [(Name = 'U13-13')] p402: allowed=FALSE
ViasUnderSMD VIA_UnderSMD_571 [(Name = 'U13-12')] p403: allowed=FALSE
ViasUnderSMD VIA_UnderSMD_570 [(Name = 'U13-11')] p404: allowed=FALSE
ViasUnderSMD VIA_UnderSMD_569 [(Name = 'U13-10')] p405: allowed=FALSE
ViasUnderSMD VIA_UnderSMD_568 [(Name = 'U13-9')] p406: allowed=FALSE
ViasUnderSMD VIA_UnderSMD_567 [(Name = 'U13-8')] p407: allowed=FALSE
ViasUnderSMD VIA_UnderSMD_566 [(Name = 'U13-7')] p408: allowed=FALSE
ViasUnderSMD VIA_UnderSMD_565 [(Name = 'U13-6')] p409: allowed=FALSE
ViasUnderSMD VIA_UnderSMD_564 [(Name = 'U13-5')] p410: allowed=FALSE
ViasUnderSMD VIA_UnderSMD_563 [(Name = 'U13-4')] p411: allowed=FALSE
ViasUnderSMD VIA_UnderSMD_562 [(Name = 'U13-3')] p412: allowed=FALSE
ViasUnderSMD VIA_UnderSMD_561 [(Name = 'U13-2')] p413: allowed=FALSE
ViasUnderSMD VIA_UnderSMD_560 [(Name = 'U13-1')] p414: allowed=FALSE
ViasUnderSMD VIA_UnderSMD_559 [(Name = 'U12-16')] p415: allowed=FALSE
ViasUnderSMD VIA_UnderSMD_558 [(Name = 'U12-15')] p416: allowed=FALSE
ViasUnderSMD VIA_UnderSMD_557 [(Name = 'U12-10')] p417: allowed=FALSE
ViasUnderSMD VIA_UnderSMD_556 [(Name = 'U12-9')] p418: allowed=FALSE
ViasUnderSMD VIA_UnderSMD_555 [(Name = 'U12-8')] p419: allowed=FALSE
ViasUnderSMD VIA_UnderSMD_554 [(Name = 'U12-7')] p420: allowed=FALSE
ViasUnderSMD VIA_UnderSMD_553 [(Name = 'U12-6')] p421: allowed=FALSE
ViasUnderSMD VIA_UnderSMD_552 [(Name = 'U12-5')] p422: allowed=FALSE
ViasUnderSMD VIA_UnderSMD_551 [(Name = 'U12-14')] p423: allowed=FALSE
ViasUnderSMD VIA_UnderSMD_550 [(Name = 'U12-13')] p424: allowed=FALSE
ViasUnderSMD VIA_UnderSMD_549 [(Name = 'U12-12')] p425: allowed=FALSE
ViasUnderSMD VIA_UnderSMD_548 [(Name = 'U12-11')] p426: allowed=FALSE
ViasUnderSMD VIA_UnderSMD_547 [(Name = 'U12-4')] p427: allowed=FALSE
ViasUnderSMD VIA_UnderSMD_546 [(Name = 'U12-3')] p428: allowed=FALSE
ViasUnderSMD VIA_UnderSMD_545 [(Name = 'U12-2')] p429: allowed=FALSE
ViasUnderSMD VIA_UnderSMD_544 [(Name = 'U12-1')] p430: allowed=FALSE
ViasUnderSMD VIA_UnderSMD_543 [(Name = 'U11-5')] p431: allowed=FALSE
ViasUnderSMD VIA_UnderSMD_542 [(Name = 'U11-4')] p432: allowed=FALSE
ViasUnderSMD VIA_UnderSMD_541 [(Name = 'U11-3')] p433: allowed=FALSE
ViasUnderSMD VIA_UnderSMD_540 [(Name = 'U11-2')] p434: allowed=FALSE
ViasUnderSMD VIA_UnderSMD_539 [(Name = 'U11-1')] p435: allowed=FALSE
ViasUnderSMD VIA_UnderSMD_538 [(Name = 'U10-16')] p436: allowed=FALSE
ViasUnderSMD VIA_UnderSMD_537 [(Name = 'U10-15')] p437: allowed=FALSE
ViasUnderSMD VIA_UnderSMD_536 [(Name = 'U10-14')] p438: allowed=FALSE
ViasUnderSMD VIA_UnderSMD_535 [(Name = 'U10-13')] p439: allowed=FALSE
ViasUnderSMD VIA_UnderSMD_534 [(Name = 'U10-12')] p440: allowed=FALSE
ViasUnderSMD VIA_UnderSMD_533 [(Name = 'U10-11')] p441: allowed=FALSE
ViasUnderSMD VIA_UnderSMD_532 [(Name = 'U10-10')] p442: allowed=FALSE
ViasUnderSMD VIA_UnderSMD_531 [(Name = 'U10-9')] p443: allowed=FALSE
ViasUnderSMD VIA_UnderSMD_530 [(Name = 'U10-8')] p444: allowed=FALSE
ViasUnderSMD VIA_UnderSMD_529 [(Name = 'U10-7')] p445: allowed=FALSE
ViasUnderSMD VIA_UnderSMD_528 [(Name = 'U10-6')] p446: allowed=FALSE
ViasUnderSMD VIA_UnderSMD_527 [(Name = 'U10-5')] p447: allowed=FALSE
ViasUnderSMD VIA_UnderSMD_526 [(Name = 'U10-4')] p448: allowed=FALSE
ViasUnderSMD VIA_UnderSMD_525 [(Name = 'U10-3')] p449: allowed=FALSE
ViasUnderSMD VIA_UnderSMD_524 [(Name = 'U10-2')] p450: allowed=FALSE
ViasUnderSMD VIA_UnderSMD_523 [(Name = 'U10-1')] p451: allowed=FALSE
ViasUnderSMD VIA_UnderSMD_522 [(Name = 'U9-5')] p452: allowed=FALSE
ViasUnderSMD VIA_UnderSMD_521 [(Name = 'U9-4')] p453: allowed=FALSE
ViasUnderSMD VIA_UnderSMD_520 [(Name = 'U9-3')] p454: allowed=FALSE
ViasUnderSMD VIA_UnderSMD_519 [(Name = 'U9-2')] p455: allowed=FALSE
ViasUnderSMD VIA_UnderSMD_518 [(Name = 'U9-1')] p456: allowed=FALSE
ViasUnderSMD VIA_UnderSMD_517 [(Name = 'U8-16')] p457: allowed=FALSE
ViasUnderSMD VIA_UnderSMD_516 [(Name = 'U8-15')] p458: allowed=FALSE
ViasUnderSMD VIA_UnderSMD_515 [(Name = 'U8-10')] p459: allowed=FALSE
ViasUnderSMD VIA_UnderSMD_514 [(Name = 'U8-9')] p460: allowed=FALSE
ViasUnderSMD VIA_UnderSMD_513 [(Name = 'U8-8')] p461: allowed=FALSE
ViasUnderSMD VIA_UnderSMD_512 [(Name = 'U8-7')] p462: allowed=FALSE
ViasUnderSMD VIA_UnderSMD_511 [(Name = 'U8-6')] p463: allowed=FALSE
ViasUnderSMD VIA_UnderSMD_510 [(Name = 'U8-5')] p464: allowed=FALSE
ViasUnderSMD VIA_UnderSMD_509 [(Name = 'U8-14')] p465: allowed=FALSE
ViasUnderSMD VIA_UnderSMD_508 [(Name = 'U8-13')] p466: allowed=FALSE
ViasUnderSMD VIA_UnderSMD_507 [(Name = 'U8-12')] p467: allowed=FALSE
ViasUnderSMD VIA_UnderSMD_506 [(Name = 'U8-11')] p468: allowed=FALSE
ViasUnderSMD VIA_UnderSMD_505 [(Name = 'U8-4')] p469: allowed=FALSE
ViasUnderSMD VIA_UnderSMD_504 [(Name = 'U8-3')] p470: allowed=FALSE
ViasUnderSMD VIA_UnderSMD_503 [(Name = 'U8-2')] p471: allowed=FALSE
ViasUnderSMD VIA_UnderSMD_502 [(Name = 'U8-1')] p472: allowed=FALSE
ViasUnderSMD VIA_UnderSMD_501 [(Name = 'U7-16')] p473: allowed=FALSE
ViasUnderSMD VIA_UnderSMD_500 [(Name = 'U7-15')] p474: allowed=FALSE
ViasUnderSMD VIA_UnderSMD_499 [(Name = 'U7-14')] p475: allowed=FALSE
ViasUnderSMD VIA_UnderSMD_498 [(Name = 'U7-13')] p476: allowed=FALSE
ViasUnderSMD VIA_UnderSMD_497 [(Name = 'U7-12')] p477: allowed=FALSE
ViasUnderSMD VIA_UnderSMD_496 [(Name = 'U7-11')] p478: allowed=FALSE
ViasUnderSMD VIA_UnderSMD_495 [(Name = 'U7-10')] p479: allowed=FALSE
ViasUnderSMD VIA_UnderSMD_494 [(Name = 'U7-9')] p480: allowed=FALSE
ViasUnderSMD VIA_UnderSMD_493 [(Name = 'U7-8')] p481: allowed=FALSE
ViasUnderSMD VIA_UnderSMD_492 [(Name = 'U7-7')] p482: allowed=FALSE
ViasUnderSMD VIA_UnderSMD_491 [(Name = 'U7-6')] p483: allowed=FALSE
ViasUnderSMD VIA_UnderSMD_490 [(Name = 'U7-5')] p484: allowed=FALSE
ViasUnderSMD VIA_UnderSMD_489 [(Name = 'U7-4')] p485: allowed=FALSE
ViasUnderSMD VIA_UnderSMD_488 [(Name = 'U7-3')] p486: allowed=FALSE
ViasUnderSMD VIA_UnderSMD_487 [(Name = 'U7-2')] p487: allowed=FALSE
ViasUnderSMD VIA_UnderSMD_486 [(Name = 'U7-1')] p488: allowed=FALSE
ViasUnderSMD VIA_UnderSMD_485 [(Name = 'U3-16')] p489: allowed=FALSE
ViasUnderSMD VIA_UnderSMD_484 [(Name = 'U3-15')] p490: allowed=FALSE
ViasUnderSMD VIA_UnderSMD_483 [(Name = 'U3-14')] p491: allowed=FALSE
ViasUnderSMD VIA_UnderSMD_482 [(Name = 'U3-13')] p492: allowed=FALSE
ViasUnderSMD VIA_UnderSMD_481 [(Name = 'U3-12')] p493: allowed=FALSE
ViasUnderSMD VIA_UnderSMD_480 [(Name = 'U3-11')] p494: allowed=FALSE
ViasUnderSMD VIA_UnderSMD_479 [(Name = 'U3-10')] p495: allowed=FALSE
ViasUnderSMD VIA_UnderSMD_478 [(Name = 'U3-9')] p496: allowed=FALSE
ViasUnderSMD VIA_UnderSMD_477 [(Name = 'U3-8')] p497: allowed=FALSE
ViasUnderSMD VIA_UnderSMD_476 [(Name = 'U3-7')] p498: allowed=FALSE
ViasUnderSMD VIA_UnderSMD_475 [(Name = 'U3-6')] p499: allowed=FALSE
ViasUnderSMD VIA_UnderSMD_474 [(Name = 'U3-5')] p500: allowed=FALSE
ViasUnderSMD VIA_UnderSMD_473 [(Name = 'U3-4')] p501: allowed=FALSE
ViasUnderSMD VIA_UnderSMD_472 [(Name = 'U3-3')] p502: allowed=FALSE
ViasUnderSMD VIA_UnderSMD_471 [(Name = 'U3-2')] p503: allowed=FALSE
ViasUnderSMD VIA_UnderSMD_470 [(Name = 'U3-1')] p504: allowed=FALSE
ViasUnderSMD VIA_UnderSMD_469 [(Name = 'U2-14')] p505: allowed=FALSE
ViasUnderSMD VIA_UnderSMD_468 [(Name = 'U2-13')] p506: allowed=FALSE
ViasUnderSMD VIA_UnderSMD_467 [(Name = 'U2-12')] p507: allowed=FALSE
ViasUnderSMD VIA_UnderSMD_466 [(Name = 'U2-11')] p508: allowed=FALSE
ViasUnderSMD VIA_UnderSMD_465 [(Name = 'U2-10')] p509: allowed=FALSE
ViasUnderSMD VIA_UnderSMD_464 [(Name = 'U2-9')] p510: allowed=FALSE
ViasUnderSMD VIA_UnderSMD_463 [(Name = 'U2-8')] p511: allowed=FALSE
ViasUnderSMD VIA_UnderSMD_462 [(Name = 'U2-7')] p512: allowed=FALSE
ViasUnderSMD VIA_UnderSMD_461 [(Name = 'U2-6')] p513: allowed=FALSE
ViasUnderSMD VIA_UnderSMD_460 [(Name = 'U2-5')] p514: allowed=FALSE
ViasUnderSMD VIA_UnderSMD_459 [(Name = 'U2-4')] p515: allowed=FALSE
ViasUnderSMD VIA_UnderSMD_458 [(Name = 'U2-3')] p516: allowed=FALSE
ViasUnderSMD VIA_UnderSMD_457 [(Name = 'U2-2')] p517: allowed=FALSE
ViasUnderSMD VIA_UnderSMD_456 [(Name = 'U2-1')] p518: allowed=FALSE
ViasUnderSMD VIA_UnderSMD_455 [(Name = 'U1-20')] p519: allowed=FALSE
ViasUnderSMD VIA_UnderSMD_454 [(Name = 'U1-19')] p520: allowed=FALSE
ViasUnderSMD VIA_UnderSMD_453 [(Name = 'U1-18')] p521: allowed=FALSE
ViasUnderSMD VIA_UnderSMD_452 [(Name = 'U1-17')] p522: allowed=FALSE
ViasUnderSMD VIA_UnderSMD_451 [(Name = 'U1-16')] p523: allowed=FALSE
ViasUnderSMD VIA_UnderSMD_450 [(Name = 'U1-15')] p524: allowed=FALSE
ViasUnderSMD VIA_UnderSMD_449 [(Name = 'U1-14')] p525: allowed=FALSE
ViasUnderSMD VIA_UnderSMD_448 [(Name = 'U1-13')] p526: allowed=FALSE
ViasUnderSMD VIA_UnderSMD_447 [(Name = 'U1-12')] p527: allowed=FALSE
ViasUnderSMD VIA_UnderSMD_446 [(Name = 'U1-11')] p528: allowed=FALSE
ViasUnderSMD VIA_UnderSMD_445 [(Name = 'U1-10')] p529: allowed=FALSE
ViasUnderSMD VIA_UnderSMD_444 [(Name = 'U1-9')] p530: allowed=FALSE
ViasUnderSMD VIA_UnderSMD_443 [(Name = 'U1-8')] p531: allowed=FALSE
ViasUnderSMD VIA_UnderSMD_442 [(Name = 'U1-7')] p532: allowed=FALSE
ViasUnderSMD VIA_UnderSMD_441 [(Name = 'U1-6')] p533: allowed=FALSE
ViasUnderSMD VIA_UnderSMD_440 [(Name = 'U1-5')] p534: allowed=FALSE
ViasUnderSMD VIA_UnderSMD_439 [(Name = 'U1-4')] p535: allowed=FALSE
ViasUnderSMD VIA_UnderSMD_438 [(Name = 'U1-3')] p536: allowed=FALSE
ViasUnderSMD VIA_UnderSMD_437 [(Name = 'U1-2')] p537: allowed=FALSE
ViasUnderSMD VIA_UnderSMD_436 [(Name = 'U1-1')] p538: allowed=FALSE
ViasUnderSMD VIA_UnderSMD_435 [(Name = 'T1-4')] p539: allowed=FALSE
ViasUnderSMD VIA_UnderSMD_434 [(Name = 'T1-3')] p540: allowed=FALSE
ViasUnderSMD VIA_UnderSMD_433 [(Name = 'T1-2')] p541: allowed=FALSE
ViasUnderSMD VIA_UnderSMD_432 [(Name = 'T1-1')] p542: allowed=FALSE
ViasUnderSMD VIA_UnderSMD_431 [(Name = 'R150-2')] p543: allowed=FALSE
ViasUnderSMD VIA_UnderSMD_430 [(Name = 'R150-1')] p544: allowed=FALSE
ViasUnderSMD VIA_UnderSMD_429 [(Name = 'R103-2')] p545: allowed=FALSE
ViasUnderSMD VIA_UnderSMD_428 [(Name = 'R103-1')] p546: allowed=FALSE
ViasUnderSMD VIA_UnderSMD_427 [(Name = 'R102-2')] p547: allowed=FALSE
ViasUnderSMD VIA_UnderSMD_426 [(Name = 'R102-1')] p548: allowed=FALSE
ViasUnderSMD VIA_UnderSMD_425 [(Name = 'R101-2')] p549: allowed=FALSE
ViasUnderSMD VIA_UnderSMD_424 [(Name = 'R101-1')] p550: allowed=FALSE
ViasUnderSMD VIA_UnderSMD_423 [(Name = 'R100-2')] p551: allowed=FALSE
ViasUnderSMD VIA_UnderSMD_422 [(Name = 'R100-1')] p552: allowed=FALSE
ViasUnderSMD VIA_UnderSMD_421 [(Name = 'R87-2')] p553: allowed=FALSE
ViasUnderSMD VIA_UnderSMD_420 [(Name = 'R87-1')] p554: allowed=FALSE
ViasUnderSMD VIA_UnderSMD_419 [(Name = 'R86-2')] p555: allowed=FALSE
ViasUnderSMD VIA_UnderSMD_418 [(Name = 'R86-1')] p556: allowed=FALSE
ViasUnderSMD VIA_UnderSMD_417 [(Name = 'R85-2')] p557: allowed=FALSE
ViasUnderSMD VIA_UnderSMD_416 [(Name = 'R85-1')] p558: allowed=FALSE
ViasUnderSMD VIA_UnderSMD_415 [(Name = 'R84-2')] p559: allowed=FALSE
ViasUnderSMD VIA_UnderSMD_414 [(Name = 'R84-1')] p560: allowed=FALSE
ViasUnderSMD VIA_UnderSMD_413 [(Name = 'R83-2')] p561: allowed=FALSE
ViasUnderSMD VIA_UnderSMD_412 [(Name = 'R83-1')] p562: allowed=FALSE
ViasUnderSMD VIA_UnderSMD_411 [(Name = 'R82-2')] p563: allowed=FALSE
ViasUnderSMD VIA_UnderSMD_410 [(Name = 'R82-1')] p564: allowed=FALSE
ViasUnderSMD VIA_UnderSMD_409 [(Name = 'R81-2')] p565: allowed=FALSE
ViasUnderSMD VIA_UnderSMD_408 [(Name = 'R81-1')] p566: allowed=FALSE
ViasUnderSMD VIA_UnderSMD_407 [(Name = 'R80-2')] p567: allowed=FALSE
ViasUnderSMD VIA_UnderSMD_406 [(Name = 'R80-1')] p568: allowed=FALSE
ViasUnderSMD VIA_UnderSMD_405 [(Name = 'R79-2')] p569: allowed=FALSE
ViasUnderSMD VIA_UnderSMD_404 [(Name = 'R79-1')] p570: allowed=FALSE
ViasUnderSMD VIA_UnderSMD_403 [(Name = 'R78-2')] p571: allowed=FALSE
ViasUnderSMD VIA_UnderSMD_402 [(Name = 'R78-1')] p572: allowed=FALSE
ViasUnderSMD VIA_UnderSMD_401 [(Name = 'R77-2')] p573: allowed=FALSE
ViasUnderSMD VIA_UnderSMD_400 [(Name = 'R77-1')] p574: allowed=FALSE
ViasUnderSMD VIA_UnderSMD_399 [(Name = 'R76-2')] p575: allowed=FALSE
ViasUnderSMD VIA_UnderSMD_398 [(Name = 'R76-1')] p576: allowed=FALSE
ViasUnderSMD VIA_UnderSMD_397 [(Name = 'R75-2')] p577: allowed=FALSE
ViasUnderSMD VIA_UnderSMD_396 [(Name = 'R75-1')] p578: allowed=FALSE
ViasUnderSMD VIA_UnderSMD_395 [(Name = 'R74-2')] p579: allowed=FALSE
ViasUnderSMD VIA_UnderSMD_394 [(Name = 'R74-1')] p580: allowed=FALSE
ViasUnderSMD VIA_UnderSMD_393 [(Name = 'R73-2')] p581: allowed=FALSE
ViasUnderSMD VIA_UnderSMD_392 [(Name = 'R73-1')] p582: allowed=FALSE
ViasUnderSMD VIA_UnderSMD_391 [(Name = 'R72-2')] p583: allowed=FALSE
ViasUnderSMD VIA_UnderSMD_390 [(Name = 'R72-1')] p584: allowed=FALSE
ViasUnderSMD VIA_UnderSMD_389 [(Name = 'R71-2')] p585: allowed=FALSE
ViasUnderSMD VIA_UnderSMD_388 [(Name = 'R71-1')] p586: allowed=FALSE
ViasUnderSMD VIA_UnderSMD_387 [(Name = 'R70-2')] p587: allowed=FALSE
ViasUnderSMD VIA_UnderSMD_386 [(Name = 'R70-1')] p588: allowed=FALSE
ViasUnderSMD VIA_UnderSMD_385 [(Name = 'R69-2')] p589: allowed=FALSE
ViasUnderSMD VIA_UnderSMD_384 [(Name = 'R69-1')] p590: allowed=FALSE
ViasUnderSMD VIA_UnderSMD_383 [(Name = 'R68-2')] p591: allowed=FALSE
ViasUnderSMD VIA_UnderSMD_382 [(Name = 'R68-1')] p592: allowed=FALSE
ViasUnderSMD VIA_UnderSMD_381 [(Name = 'R67-2')] p593: allowed=FALSE
ViasUnderSMD VIA_UnderSMD_380 [(Name = 'R67-1')] p594: allowed=FALSE
ViasUnderSMD VIA_UnderSMD_379 [(Name = 'R66-2')] p595: allowed=FALSE
ViasUnderSMD VIA_UnderSMD_378 [(Name = 'R66-1')] p596: allowed=FALSE
ViasUnderSMD VIA_UnderSMD_377 [(Name = 'R65-2')] p597: allowed=FALSE
ViasUnderSMD VIA_UnderSMD_376 [(Name = 'R65-1')] p598: allowed=FALSE
ViasUnderSMD VIA_UnderSMD_375 [(Name = 'R64-2')] p599: allowed=FALSE
ViasUnderSMD VIA_UnderSMD_374 [(Name = 'R64-1')] p600: allowed=FALSE
ViasUnderSMD VIA_UnderSMD_373 [(Name = 'R63-2')] p601: allowed=FALSE
ViasUnderSMD VIA_UnderSMD_372 [(Name = 'R63-1')] p602: allowed=FALSE
ViasUnderSMD VIA_UnderSMD_371 [(Name = 'R62-2')] p603: allowed=FALSE
ViasUnderSMD VIA_UnderSMD_370 [(Name = 'R62-1')] p604: allowed=FALSE
ViasUnderSMD VIA_UnderSMD_369 [(Name = 'R61-2')] p605: allowed=FALSE
ViasUnderSMD VIA_UnderSMD_368 [(Name = 'R61-1')] p606: allowed=FALSE
ViasUnderSMD VIA_UnderSMD_367 [(Name = 'R60-2')] p607: allowed=FALSE
ViasUnderSMD VIA_UnderSMD_366 [(Name = 'R60-1')] p608: allowed=FALSE
ViasUnderSMD VIA_UnderSMD_365 [(Name = 'R59-2')] p609: allowed=FALSE
ViasUnderSMD VIA_UnderSMD_364 [(Name = 'R59-1')] p610: allowed=FALSE
ViasUnderSMD VIA_UnderSMD_363 [(Name = 'R58-2')] p611: allowed=FALSE
ViasUnderSMD VIA_UnderSMD_362 [(Name = 'R58-1')] p612: allowed=FALSE
ViasUnderSMD VIA_UnderSMD_361 [(Name = 'R57-2')] p613: allowed=FALSE
ViasUnderSMD VIA_UnderSMD_360 [(Name = 'R57-1')] p614: allowed=FALSE
ViasUnderSMD VIA_UnderSMD_359 [(Name = 'R56-2')] p615: allowed=FALSE
ViasUnderSMD VIA_UnderSMD_358 [(Name = 'R56-1')] p616: allowed=FALSE
ViasUnderSMD VIA_UnderSMD_357 [(Name = 'R55-2')] p617: allowed=FALSE
ViasUnderSMD VIA_UnderSMD_356 [(Name = 'R55-1')] p618: allowed=FALSE
ViasUnderSMD VIA_UnderSMD_355 [(Name = 'R54-2')] p619: allowed=FALSE
ViasUnderSMD VIA_UnderSMD_354 [(Name = 'R54-1')] p620: allowed=FALSE
ViasUnderSMD VIA_UnderSMD_353 [(Name = 'R53-2')] p621: allowed=FALSE
ViasUnderSMD VIA_UnderSMD_352 [(Name = 'R53-1')] p622: allowed=FALSE
ViasUnderSMD VIA_UnderSMD_351 [(Name = 'R52-2')] p623: allowed=FALSE
ViasUnderSMD VIA_UnderSMD_350 [(Name = 'R52-1')] p624: allowed=FALSE
ViasUnderSMD VIA_UnderSMD_349 [(Name = 'R51-2')] p625: allowed=FALSE
ViasUnderSMD VIA_UnderSMD_348 [(Name = 'R51-1')] p626: allowed=FALSE
ViasUnderSMD VIA_UnderSMD_347 [(Name = 'R50-2')] p627: allowed=FALSE
ViasUnderSMD VIA_UnderSMD_346 [(Name = 'R50-1')] p628: allowed=FALSE
ViasUnderSMD VIA_UnderSMD_345 [(Name = 'R49-2')] p629: allowed=FALSE
ViasUnderSMD VIA_UnderSMD_344 [(Name = 'R49-1')] p630: allowed=FALSE
ViasUnderSMD VIA_UnderSMD_343 [(Name = 'R48-2')] p631: allowed=FALSE
ViasUnderSMD VIA_UnderSMD_342 [(Name = 'R48-1')] p632: allowed=FALSE
ViasUnderSMD VIA_UnderSMD_341 [(Name = 'R47-2')] p633: allowed=FALSE
ViasUnderSMD VIA_UnderSMD_340 [(Name = 'R47-1')] p634: allowed=FALSE
ViasUnderSMD VIA_UnderSMD_339 [(Name = 'R46-2')] p635: allowed=FALSE
ViasUnderSMD VIA_UnderSMD_338 [(Name = 'R46-1')] p636: allowed=FALSE
ViasUnderSMD VIA_UnderSMD_337 [(Name = 'R45-2')] p637: allowed=FALSE
ViasUnderSMD VIA_UnderSMD_336 [(Name = 'R45-1')] p638: allowed=FALSE
ViasUnderSMD VIA_UnderSMD_335 [(Name = 'R44-2')] p639: allowed=FALSE
ViasUnderSMD VIA_UnderSMD_334 [(Name = 'R44-1')] p640: allowed=FALSE
ViasUnderSMD VIA_UnderSMD_333 [(Name = 'R43-2')] p641: allowed=FALSE
ViasUnderSMD VIA_UnderSMD_332 [(Name = 'R43-1')] p642: allowed=FALSE
ViasUnderSMD VIA_UnderSMD_331 [(Name = 'R42-2')] p643: allowed=FALSE
ViasUnderSMD VIA_UnderSMD_330 [(Name = 'R42-1')] p644: allowed=FALSE
ViasUnderSMD VIA_UnderSMD_329 [(Name = 'R41-2')] p645: allowed=FALSE
ViasUnderSMD VIA_UnderSMD_328 [(Name = 'R41-1')] p646: allowed=FALSE
ViasUnderSMD VIA_UnderSMD_327 [(Name = 'R40-2')] p647: allowed=FALSE
ViasUnderSMD VIA_UnderSMD_326 [(Name = 'R40-1')] p648: allowed=FALSE
ViasUnderSMD VIA_UnderSMD_325 [(Name = 'R39-2')] p649: allowed=FALSE
ViasUnderSMD VIA_UnderSMD_324 [(Name = 'R39-1')] p650: allowed=FALSE
ViasUnderSMD VIA_UnderSMD_323 [(Name = 'R38-2')] p651: allowed=FALSE
ViasUnderSMD VIA_UnderSMD_322 [(Name = 'R38-1')] p652: allowed=FALSE
ViasUnderSMD VIA_UnderSMD_321 [(Name = 'R37-2')] p653: allowed=FALSE
ViasUnderSMD VIA_UnderSMD_320 [(Name = 'R37-1')] p654: allowed=FALSE
ViasUnderSMD VIA_UnderSMD_319 [(Name = 'R36-2')] p655: allowed=FALSE
ViasUnderSMD VIA_UnderSMD_318 [(Name = 'R36-1')] p656: allowed=FALSE
ViasUnderSMD VIA_UnderSMD_317 [(Name = 'R35-2')] p657: allowed=FALSE
ViasUnderSMD VIA_UnderSMD_316 [(Name = 'R35-1')] p658: allowed=FALSE
ViasUnderSMD VIA_UnderSMD_315 [(Name = 'R34-2')] p659: allowed=FALSE
ViasUnderSMD VIA_UnderSMD_314 [(Name = 'R34-1')] p660: allowed=FALSE
ViasUnderSMD VIA_UnderSMD_313 [(Name = 'R33-2')] p661: allowed=FALSE
ViasUnderSMD VIA_UnderSMD_312 [(Name = 'R33-1')] p662: allowed=FALSE
ViasUnderSMD VIA_UnderSMD_311 [(Name = 'R32-2')] p663: allowed=FALSE
ViasUnderSMD VIA_UnderSMD_310 [(Name = 'R32-1')] p664: allowed=FALSE
ViasUnderSMD VIA_UnderSMD_309 [(Name = 'R31-2')] p665: allowed=FALSE
ViasUnderSMD VIA_UnderSMD_308 [(Name = 'R31-1')] p666: allowed=FALSE
ViasUnderSMD VIA_UnderSMD_307 [(Name = 'R30-2')] p667: allowed=FALSE
ViasUnderSMD VIA_UnderSMD_306 [(Name = 'R30-1')] p668: allowed=FALSE
ViasUnderSMD VIA_UnderSMD_305 [(Name = 'R29-2')] p669: allowed=FALSE
ViasUnderSMD VIA_UnderSMD_304 [(Name = 'R29-1')] p670: allowed=FALSE
ViasUnderSMD VIA_UnderSMD_303 [(Name = 'R28-2')] p671: allowed=FALSE
ViasUnderSMD VIA_UnderSMD_302 [(Name = 'R28-1')] p672: allowed=FALSE
ViasUnderSMD VIA_UnderSMD_301 [(Name = 'R27-2')] p673: allowed=FALSE
ViasUnderSMD VIA_UnderSMD_300 [(Name = 'R27-1')] p674: allowed=FALSE
ViasUnderSMD VIA_UnderSMD_299 [(Name = 'R26-2')] p675: allowed=FALSE
ViasUnderSMD VIA_UnderSMD_298 [(Name = 'R26-1')] p676: allowed=FALSE
ViasUnderSMD VIA_UnderSMD_297 [(Name = 'R25-2')] p677: allowed=FALSE
ViasUnderSMD VIA_UnderSMD_296 [(Name = 'R25-1')] p678: allowed=FALSE